# EAGLE board SparkFun_Qwiic_CO2_Sensor_SCD40-Panel (EAGLE 9.6.2), part 1 of 3
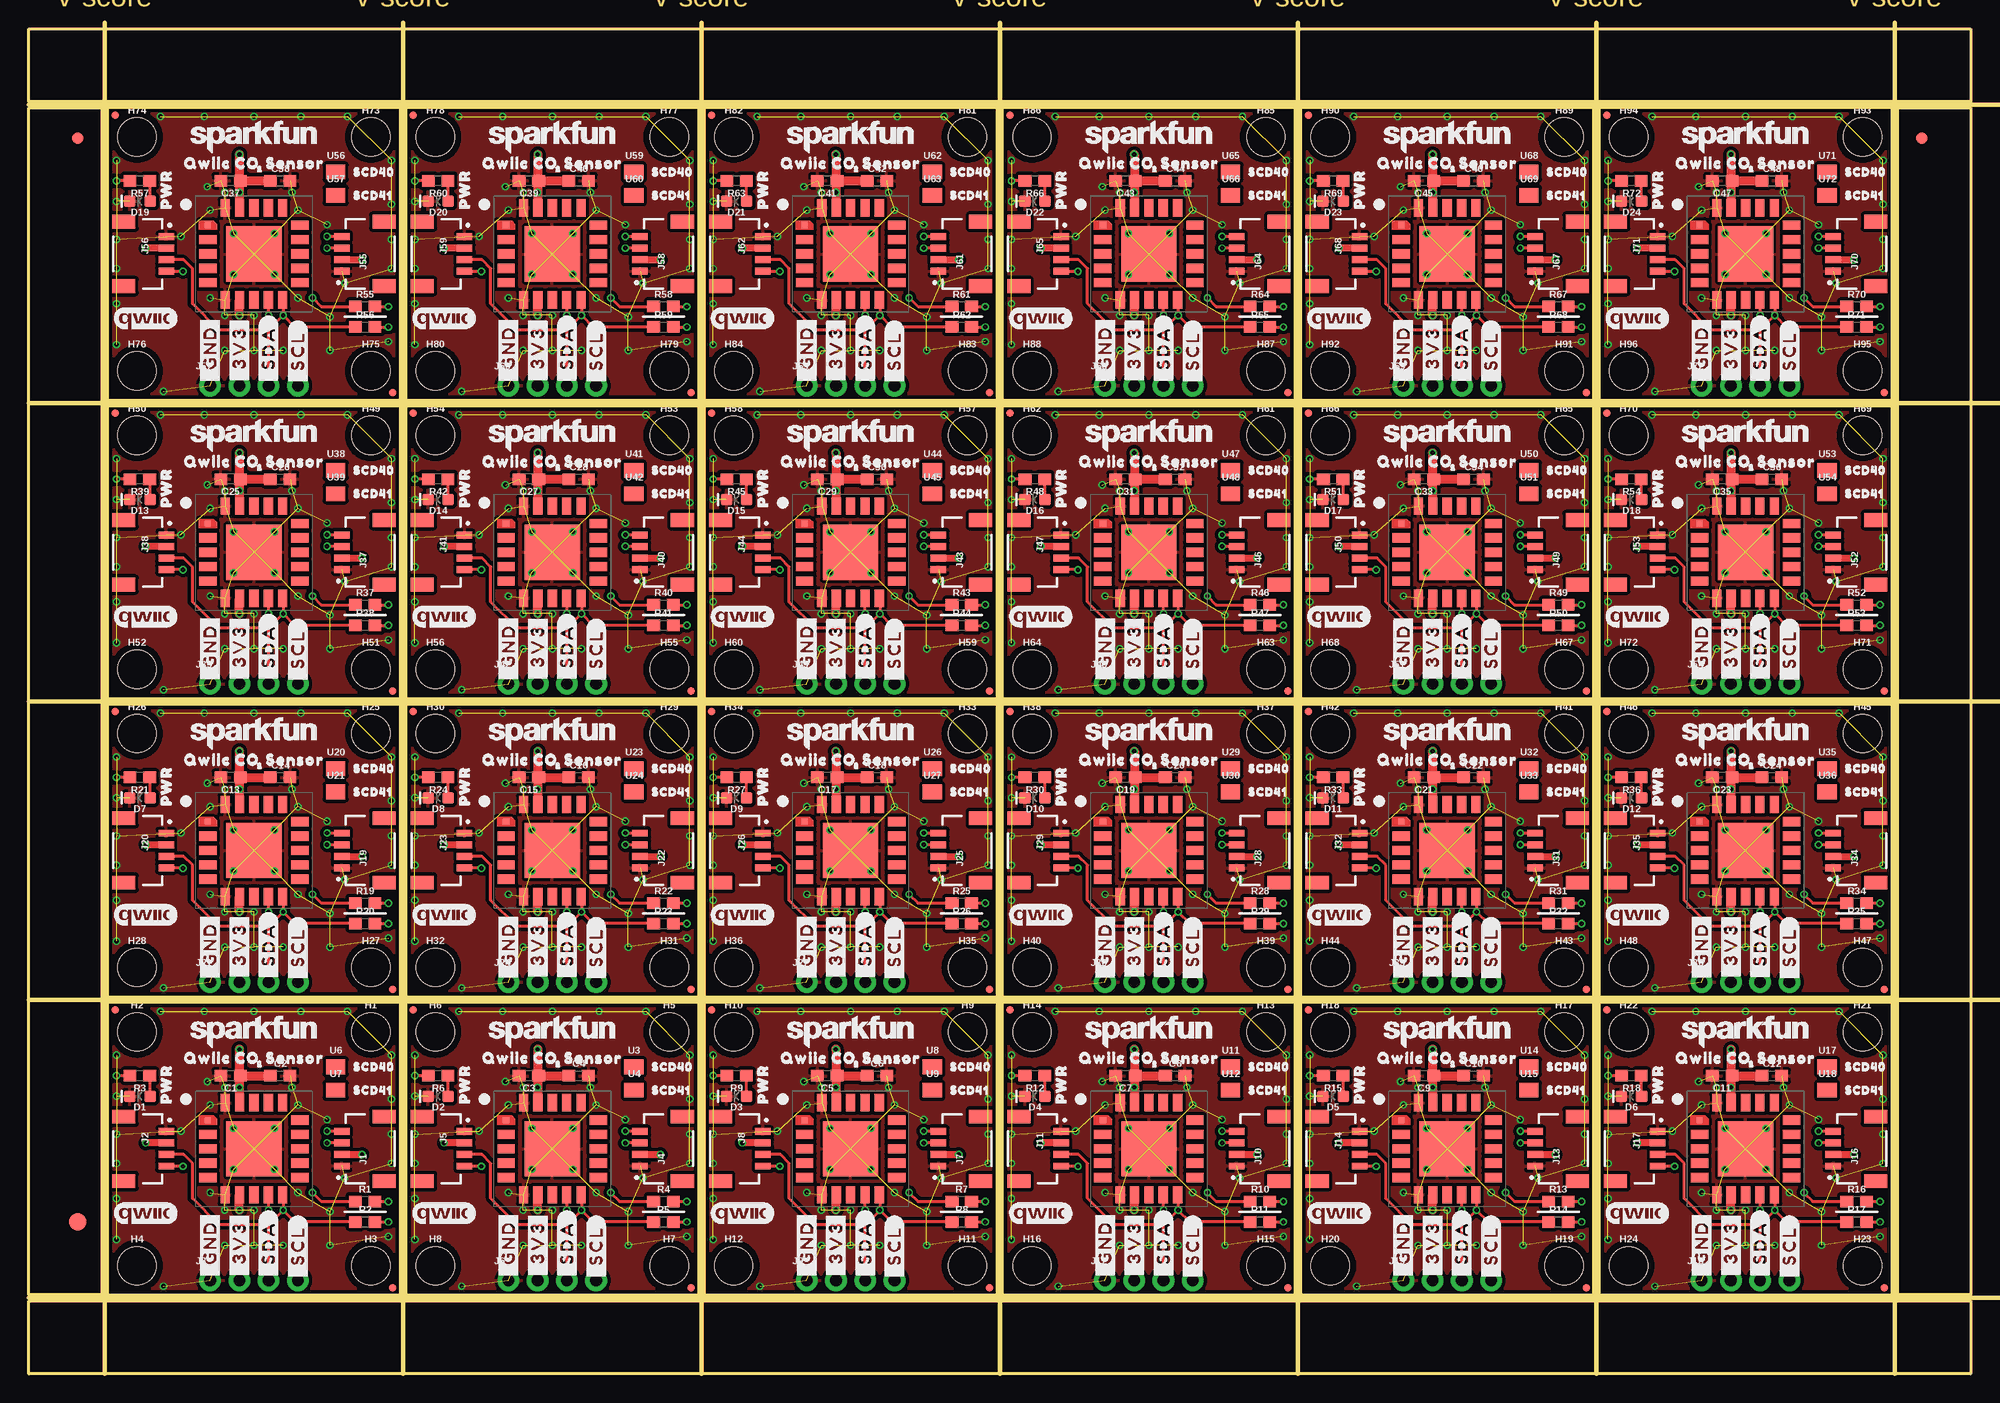
[diagram p0: board, top side]
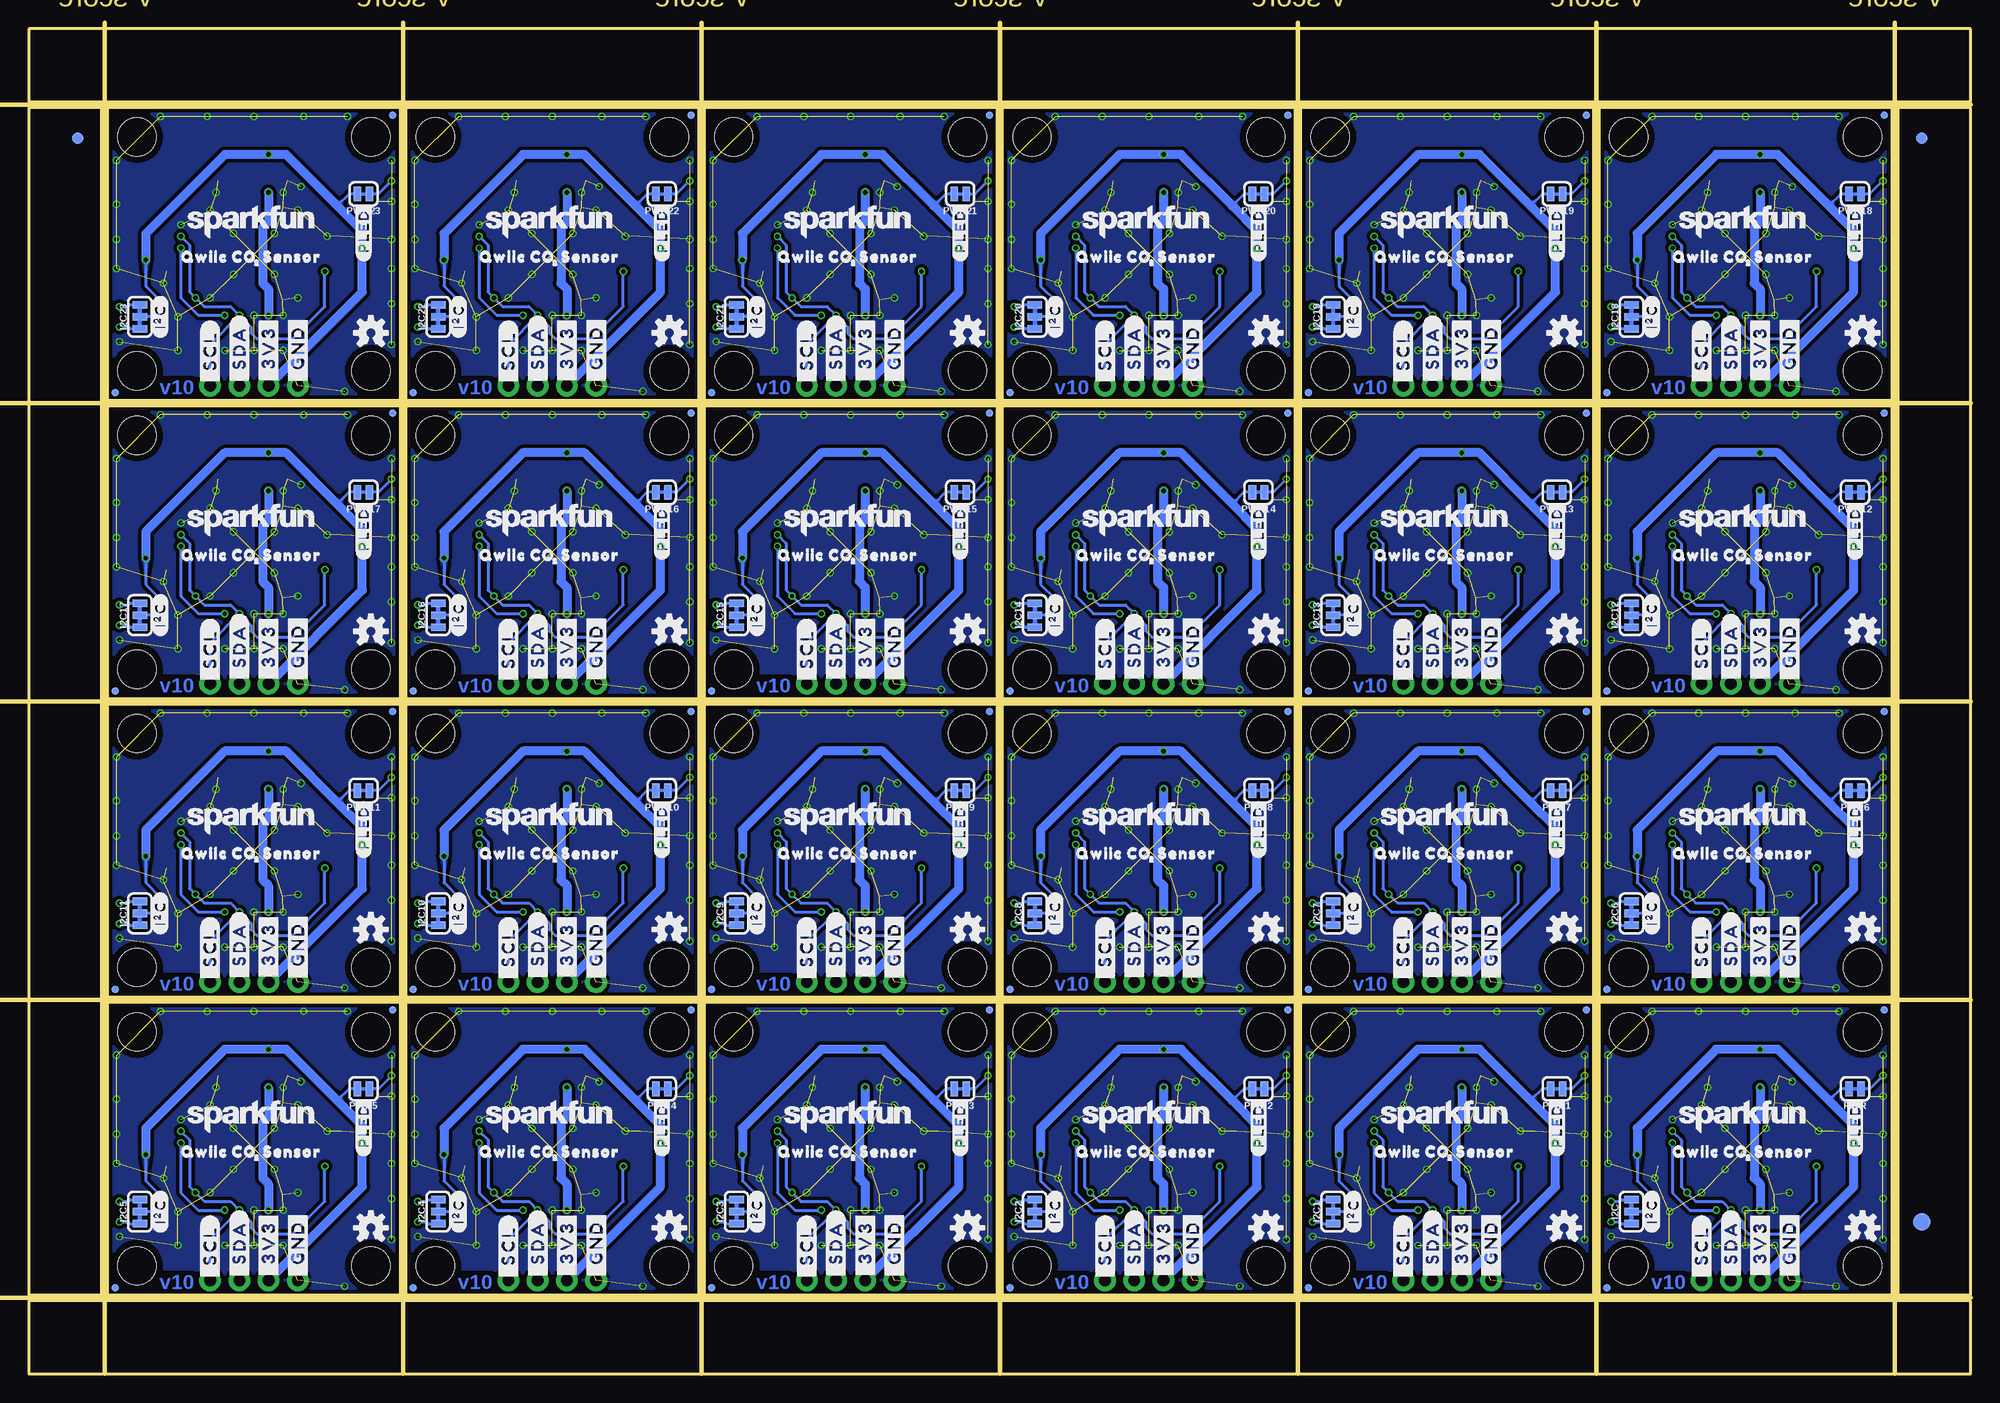
[diagram p1: board, bottom side, seen from below]

Size 168.66 x 116.84 mm. Coordinates in mm from the lower left corner, seen from the top.
Outline: 6.86,6.86 32.26,6.86 32.26,32.26 6.86,32.26 6.86,6.86
Outline: 32.77,6.86 58.17,6.86 58.17,32.26 32.77,32.26 32.77,6.86
Outline: 58.67,6.86 84.07,6.86 84.07,32.26 58.67,32.26 58.67,6.86
Outline: 84.58,6.86 109.98,6.86 109.98,32.26 84.58,32.26 84.58,6.86
Outline: 110.49,6.86 135.89,6.86 135.89,32.26 110.49,32.26 110.49,6.86
Outline: 136.4,6.86 161.8,6.86 161.8,32.26 136.4,32.26 136.4,6.86
Outline: 6.86,32.77 32.26,32.77 32.26,58.17 6.86,58.17 6.86,32.77
Outline: 32.77,32.77 58.17,32.77 58.17,58.17 32.77,58.17 32.77,32.77
Outline: 58.67,32.77 84.07,32.77 84.07,58.17 58.67,58.17 58.67,32.77
Outline: 84.58,32.77 109.98,32.77 109.98,58.17 84.58,58.17 84.58,32.77
Outline: 110.49,32.77 135.89,32.77 135.89,58.17 110.49,58.17 110.49,32.77
Outline: 136.4,32.77 161.8,32.77 161.8,58.17 136.4,58.17 136.4,32.77
Outline: 6.86,58.67 32.26,58.67 32.26,84.07 6.86,84.07 6.86,58.67
Outline: 32.77,58.67 58.17,58.67 58.17,84.07 32.77,84.07 32.77,58.67
Outline: 58.67,58.67 84.07,58.67 84.07,84.07 58.67,84.07 58.67,58.67
Outline: 84.58,58.67 109.98,58.67 109.98,84.07 84.58,84.07 84.58,58.67
Outline: 110.49,58.67 135.89,58.67 135.89,84.07 110.49,84.07 110.49,58.67
Outline: 136.4,58.67 161.8,58.67 161.8,84.07 136.4,84.07 136.4,58.67
Outline: 6.86,84.58 32.26,84.58 32.26,109.98 6.86,109.98 6.86,84.58
Outline: 32.77,84.58 58.17,84.58 58.17,109.98 32.77,109.98 32.77,84.58
Outline: 58.67,84.58 84.07,84.58 84.07,109.98 58.67,109.98 58.67,84.58
Outline: 84.58,84.58 109.98,84.58 109.98,109.98 84.58,109.98 84.58,84.58
Outline: 110.49,84.58 135.89,84.58 135.89,109.98 110.49,109.98 110.49,84.58
Outline: 136.4,84.58 161.8,84.58 161.8,109.98 136.4,109.98 136.4,84.58
Outline: 0,6.35 168.66,6.35 168.66,0 0,0 0,6.35
Outline: 162.31,109.98 168.66,109.98 168.66,6.86 162.31,6.86 162.31,109.98
Outline: 0,116.84 168.66,116.84 168.66,110.49 0,110.49 0,116.84
Outline: 0,109.98 6.35,109.98 6.35,6.86 0,6.86 0,109.98
Copper layers (1*16): Top 0.035mm / dielectric 1.5mm / Bottom 0.035mm
Design rules "SparkFun_Qwiic_CO2_Sensor_SCD40": minimum track width 5mil, minimum drill 0.3mm, track to track 5mil, track to pad 5mil, pad to pad 5mil, via to via 5mil, smd to smd 5mil, copper to edge 7mil, drill to drill 7mil, minimum pad ring 5mil, minimum via ring 5mil, stop-mask expansion 2.5mil, vias tented up to drill 25mil, thermal gap 10mil
Milling: 12 lines

## Footprints (pad centres in the part's own frame; a part is rotated, then mirrored left to right if it is on the bottom)
0603 = smd 1.1 x 1: 1 -0.85,0; 2 0.85,0
LED-0603 = smd 1 x 1: A -0.877,0; C 0.877,0
FIDUCIAL-1X2 = smd 1 x 1: 1 0,0
FIDUCIAL-1.5X3 = smd 1.5 x 1.5: 1 0,0
FIDUCIAL-MICRO = smd 0.635 x 0.635: 1 0,0
STAND-OFF = hole 3.302: 0,0
SMT-JUMPER_3_2-NC_TRACE_SILK = smd 0.66 x 1.27: 1 -1.041,0; 2 0,0; 3 1.041,0
JST04_1MM_RA = smd 0.6 x 1.35: 1 -1.5,0; 2 -0.5,0; 3 0.5,0; 4 1.5,0 | smd 1.2 x 2: NC1 2.8,-3.675; NC2 -2.8,-3.675
1X04_NO_SILK = drill 1.016 pad 1.88: 1 0,0; 2 2.54,0; 3 5.08,0; 4 7.62,0
SMT-JUMPER_2_NC_TRACE_SILK = smd 0.66 x 1.27: 1 -0.521,0; 2 0.521,0
SCD4X = smd 0.5 x 0.5: 1 -4,2.5 | smd 1.5 x 0.8: 2 -4,1.25; 3 -4,0; 4 -4,-1.25; 5 -4,-2.5; 11 4,-2.5; 12 4,-1.25; 13 4,0; 14 4,1.25; 15 4,2.5 | smd 0.8 x 1.5: 6 -2.5,-4; 7 -1.25,-4; 8 0,-4; 9 1.25,-4; 10 2.5,-4; 16 2.5,4; 17 1.25,4; 18 0,4; 19 -1.25,4; 20 -2.5,4 | smd 4.8 x 4.8: CP 0,0
PRODUCT_IDENT_PASTE_NO-SILK = smd 1.676 x 1.27: 1 -0.025,0
PRODUCT_IDENT_NO_NO-SILK = smd 1.676 x 1.27: 1 -0.025,0

## Placement (x,y rotation side)
C1  0.1uF  [0603]  17.53,25.91 180 top
C2  4.7uF  [0603]  21.84,25.91 0 top
C3  0.1uF  [0603]  43.43,25.91 180 top
C4  4.7uF  [0603]  47.75,25.91 0 top
C5  0.1uF  [0603]  69.34,25.91 180 top
C6  4.7uF  [0603]  73.66,25.91 0 top
C7  0.1uF  [0603]  95.25,25.91 180 top
C8  4.7uF  [0603]  99.57,25.91 0 top
C9  0.1uF  [0603]  121.16,25.91 180 top
C10  4.7uF  [0603]  125.48,25.91 0 top
C11  0.1uF  [0603]  147.07,25.91 180 top
C12  4.7uF  [0603]  151.38,25.91 0 top
C13  0.1uF  [0603]  17.53,51.82 180 top
C14  4.7uF  [0603]  21.84,51.82 0 top
C15  0.1uF  [0603]  43.43,51.82 180 top
C16  4.7uF  [0603]  47.75,51.82 0 top
C17  0.1uF  [0603]  69.34,51.82 180 top
C18  4.7uF  [0603]  73.66,51.82 0 top
C19  0.1uF  [0603]  95.25,51.82 180 top
C20  4.7uF  [0603]  99.57,51.82 0 top
C21  0.1uF  [0603]  121.16,51.82 180 top
C22  4.7uF  [0603]  125.48,51.82 0 top
C23  0.1uF  [0603]  147.07,51.82 180 top
C24  4.7uF  [0603]  151.38,51.82 0 top
C25  0.1uF  [0603]  17.53,77.72 180 top
C26  4.7uF  [0603]  21.84,77.72 0 top
C27  0.1uF  [0603]  43.43,77.72 180 top
C28  4.7uF  [0603]  47.75,77.72 0 top
C29  0.1uF  [0603]  69.34,77.72 180 top
C30  4.7uF  [0603]  73.66,77.72 0 top
C31  0.1uF  [0603]  95.25,77.72 180 top
C32  4.7uF  [0603]  99.57,77.72 0 top
C33  0.1uF  [0603]  121.16,77.72 180 top
C34  4.7uF  [0603]  125.48,77.72 0 top
C35  0.1uF  [0603]  147.07,77.72 180 top
C36  4.7uF  [0603]  151.38,77.72 0 top
C37  0.1uF  [0603]  17.53,103.63 180 top
C38  4.7uF  [0603]  21.84,103.63 0 top
C39  0.1uF  [0603]  43.43,103.63 180 top
C40  4.7uF  [0603]  47.75,103.63 0 top
C41  0.1uF  [0603]  69.34,103.63 180 top
C42  4.7uF  [0603]  73.66,103.63 0 top
C43  0.1uF  [0603]  95.25,103.63 180 top
C44  4.7uF  [0603]  99.57,103.63 0 top
C45  0.1uF  [0603]  121.16,103.63 180 top
C46  4.7uF  [0603]  125.48,103.63 0 top
C47  0.1uF  [0603]  147.07,103.63 180 top
C48  4.7uF  [0603]  151.38,103.63 0 top
D1  RED  [LED-0603]  9.65,24.13 180 top
D2  RED  [LED-0603]  35.56,24.13 180 top
D3  RED  [LED-0603]  61.47,24.13 180 top
D4  RED  [LED-0603]  87.38,24.13 180 top
D5  RED  [LED-0603]  113.28,24.13 180 top
D6  RED  [LED-0603]  139.19,24.13 180 top
D7  RED  [LED-0603]  9.65,50.04 180 top
D8  RED  [LED-0603]  35.56,50.04 180 top
D9  RED  [LED-0603]  61.47,50.04 180 top
D10  RED  [LED-0603]  87.38,50.04 180 top
D11  RED  [LED-0603]  113.28,50.04 180 top
D12  RED  [LED-0603]  139.19,50.04 180 top
D13  RED  [LED-0603]  9.65,75.95 180 top
D14  RED  [LED-0603]  35.56,75.95 180 top
D15  RED  [LED-0603]  61.47,75.95 180 top
D16  RED  [LED-0603]  87.38,75.95 180 top
D17  RED  [LED-0603]  113.28,75.95 180 top
D18  RED  [LED-0603]  139.19,75.95 180 top
D19  RED  [LED-0603]  9.65,101.85 180 top
D20  RED  [LED-0603]  35.56,101.85 180 top
D21  RED  [LED-0603]  61.47,101.85 180 top
D22  RED  [LED-0603]  87.38,101.85 180 top
D23  RED  [LED-0603]  113.28,101.85 180 top
D24  RED  [LED-0603]  139.19,101.85 180 top
E$1  [FIDUCIAL-1X2]  4.23,107.31 0 top
E$2  [FIDUCIAL-1X2]  4.23,107.31 0 bottom
E$3  [FIDUCIAL-1X2]  164.42,107.31 0 top
E$4  [FIDUCIAL-1X2]  164.42,107.31 0 bottom
E$5  [FIDUCIAL-1.5X3]  4.23,13.21 0 top
E$6  [FIDUCIAL-1.5X3]  4.23,13.21 0 bottom
FD1  FIDUCIALUFIDUCIAL  [FIDUCIAL-MICRO]  31.62,7.49 0 bottom
FD2  FIDUCIALUFIDUCIAL  [FIDUCIAL-MICRO]  7.49,31.62 0 bottom
FD3  FIDUCIALUFIDUCIAL  [FIDUCIAL-MICRO]  7.49,31.62 0 top
FD4  FIDUCIALUFIDUCIAL  [FIDUCIAL-MICRO]  31.62,7.49 0 top
FD5  FIDUCIALUFIDUCIAL  [FIDUCIAL-MICRO]  57.53,7.49 0 bottom
FD6  FIDUCIALUFIDUCIAL  [FIDUCIAL-MICRO]  33.4,31.62 0 bottom
FD7  FIDUCIALUFIDUCIAL  [FIDUCIAL-MICRO]  33.4,31.62 0 top
FD8  FIDUCIALUFIDUCIAL  [FIDUCIAL-MICRO]  57.53,7.49 0 top
FD9  FIDUCIALUFIDUCIAL  [FIDUCIAL-MICRO]  83.44,7.49 0 bottom
FD10  FIDUCIALUFIDUCIAL  [FIDUCIAL-MICRO]  59.31,31.62 0 bottom
FD11  FIDUCIALUFIDUCIAL  [FIDUCIAL-MICRO]  59.31,31.62 0 top
FD12  FIDUCIALUFIDUCIAL  [FIDUCIAL-MICRO]  83.44,7.49 0 top
FD13  FIDUCIALUFIDUCIAL  [FIDUCIAL-MICRO]  109.35,7.49 0 bottom
FD14  FIDUCIALUFIDUCIAL  [FIDUCIAL-MICRO]  85.22,31.62 0 bottom
FD15  FIDUCIALUFIDUCIAL  [FIDUCIAL-MICRO]  85.22,31.62 0 top
FD16  FIDUCIALUFIDUCIAL  [FIDUCIAL-MICRO]  109.35,7.49 0 top
FD17  FIDUCIALUFIDUCIAL  [FIDUCIAL-MICRO]  135.25,7.49 0 bottom
FD18  FIDUCIALUFIDUCIAL  [FIDUCIAL-MICRO]  111.12,31.62 0 bottom
FD19  FIDUCIALUFIDUCIAL  [FIDUCIAL-MICRO]  111.12,31.62 0 top
FD20  FIDUCIALUFIDUCIAL  [FIDUCIAL-MICRO]  135.25,7.49 0 top
FD21  FIDUCIALUFIDUCIAL  [FIDUCIAL-MICRO]  161.16,7.49 0 bottom
FD22  FIDUCIALUFIDUCIAL  [FIDUCIAL-MICRO]  137.03,31.62 0 bottom
FD23  FIDUCIALUFIDUCIAL  [FIDUCIAL-MICRO]  137.03,31.62 0 top
FD24  FIDUCIALUFIDUCIAL  [FIDUCIAL-MICRO]  161.16,7.49 0 top
FD25  FIDUCIALUFIDUCIAL  [FIDUCIAL-MICRO]  31.62,33.4 0 bottom
FD26  FIDUCIALUFIDUCIAL  [FIDUCIAL-MICRO]  7.49,57.53 0 bottom
FD27  FIDUCIALUFIDUCIAL  [FIDUCIAL-MICRO]  7.49,57.53 0 top
FD28  FIDUCIALUFIDUCIAL  [FIDUCIAL-MICRO]  31.62,33.4 0 top
FD29  FIDUCIALUFIDUCIAL  [FIDUCIAL-MICRO]  57.53,33.4 0 bottom
FD30  FIDUCIALUFIDUCIAL  [FIDUCIAL-MICRO]  33.4,57.53 0 bottom
FD31  FIDUCIALUFIDUCIAL  [FIDUCIAL-MICRO]  33.4,57.53 0 top
FD32  FIDUCIALUFIDUCIAL  [FIDUCIAL-MICRO]  57.53,33.4 0 top
FD33  FIDUCIALUFIDUCIAL  [FIDUCIAL-MICRO]  83.44,33.4 0 bottom
FD34  FIDUCIALUFIDUCIAL  [FIDUCIAL-MICRO]  59.31,57.53 0 bottom
FD35  FIDUCIALUFIDUCIAL  [FIDUCIAL-MICRO]  59.31,57.53 0 top
FD36  FIDUCIALUFIDUCIAL  [FIDUCIAL-MICRO]  83.44,33.4 0 top
FD37  FIDUCIALUFIDUCIAL  [FIDUCIAL-MICRO]  109.35,33.4 0 bottom
FD38  FIDUCIALUFIDUCIAL  [FIDUCIAL-MICRO]  85.22,57.53 0 bottom
FD39  FIDUCIALUFIDUCIAL  [FIDUCIAL-MICRO]  85.22,57.53 0 top
FD40  FIDUCIALUFIDUCIAL  [FIDUCIAL-MICRO]  109.35,33.4 0 top
FD41  FIDUCIALUFIDUCIAL  [FIDUCIAL-MICRO]  135.25,33.4 0 bottom
FD42  FIDUCIALUFIDUCIAL  [FIDUCIAL-MICRO]  111.12,57.53 0 bottom
FD43  FIDUCIALUFIDUCIAL  [FIDUCIAL-MICRO]  111.12,57.53 0 top
FD44  FIDUCIALUFIDUCIAL  [FIDUCIAL-MICRO]  135.25,33.4 0 top
FD45  FIDUCIALUFIDUCIAL  [FIDUCIAL-MICRO]  161.16,33.4 0 bottom
FD46  FIDUCIALUFIDUCIAL  [FIDUCIAL-MICRO]  137.03,57.53 0 bottom
FD47  FIDUCIALUFIDUCIAL  [FIDUCIAL-MICRO]  137.03,57.53 0 top
FD48  FIDUCIALUFIDUCIAL  [FIDUCIAL-MICRO]  161.16,33.4 0 top
FD49  FIDUCIALUFIDUCIAL  [FIDUCIAL-MICRO]  31.62,59.31 0 bottom
FD50  FIDUCIALUFIDUCIAL  [FIDUCIAL-MICRO]  7.49,83.44 0 bottom
FD51  FIDUCIALUFIDUCIAL  [FIDUCIAL-MICRO]  7.49,83.44 0 top
FD52  FIDUCIALUFIDUCIAL  [FIDUCIAL-MICRO]  31.62,59.31 0 top
FD53  FIDUCIALUFIDUCIAL  [FIDUCIAL-MICRO]  57.53,59.31 0 bottom
FD54  FIDUCIALUFIDUCIAL  [FIDUCIAL-MICRO]  33.4,83.44 0 bottom
FD55  FIDUCIALUFIDUCIAL  [FIDUCIAL-MICRO]  33.4,83.44 0 top
FD56  FIDUCIALUFIDUCIAL  [FIDUCIAL-MICRO]  57.53,59.31 0 top
FD57  FIDUCIALUFIDUCIAL  [FIDUCIAL-MICRO]  83.44,59.31 0 bottom
FD58  FIDUCIALUFIDUCIAL  [FIDUCIAL-MICRO]  59.31,83.44 0 bottom
FD59  FIDUCIALUFIDUCIAL  [FIDUCIAL-MICRO]  59.31,83.44 0 top
FD60  FIDUCIALUFIDUCIAL  [FIDUCIAL-MICRO]  83.44,59.31 0 top
FD61  FIDUCIALUFIDUCIAL  [FIDUCIAL-MICRO]  109.35,59.31 0 bottom
FD62  FIDUCIALUFIDUCIAL  [FIDUCIAL-MICRO]  85.22,83.44 0 bottom
FD63  FIDUCIALUFIDUCIAL  [FIDUCIAL-MICRO]  85.22,83.44 0 top
FD64  FIDUCIALUFIDUCIAL  [FIDUCIAL-MICRO]  109.35,59.31 0 top
FD65  FIDUCIALUFIDUCIAL  [FIDUCIAL-MICRO]  135.25,59.31 0 bottom
FD66  FIDUCIALUFIDUCIAL  [FIDUCIAL-MICRO]  111.12,83.44 0 bottom
FD67  FIDUCIALUFIDUCIAL  [FIDUCIAL-MICRO]  111.12,83.44 0 top
FD68  FIDUCIALUFIDUCIAL  [FIDUCIAL-MICRO]  135.25,59.31 0 top
FD69  FIDUCIALUFIDUCIAL  [FIDUCIAL-MICRO]  161.16,59.31 0 bottom
FD70  FIDUCIALUFIDUCIAL  [FIDUCIAL-MICRO]  137.03,83.44 0 bottom
FD71  FIDUCIALUFIDUCIAL  [FIDUCIAL-MICRO]  137.03,83.44 0 top
FD72  FIDUCIALUFIDUCIAL  [FIDUCIAL-MICRO]  161.16,59.31 0 top
FD73  FIDUCIALUFIDUCIAL  [FIDUCIAL-MICRO]  31.62,85.22 0 bottom
FD74  FIDUCIALUFIDUCIAL  [FIDUCIAL-MICRO]  7.49,109.35 0 bottom
FD75  FIDUCIALUFIDUCIAL  [FIDUCIAL-MICRO]  7.49,109.35 0 top
FD76  FIDUCIALUFIDUCIAL  [FIDUCIAL-MICRO]  31.62,85.22 0 top
FD77  FIDUCIALUFIDUCIAL  [FIDUCIAL-MICRO]  57.53,85.22 0 bottom
FD78  FIDUCIALUFIDUCIAL  [FIDUCIAL-MICRO]  33.4,109.35 0 bottom
FD79  FIDUCIALUFIDUCIAL  [FIDUCIAL-MICRO]  33.4,109.35 0 top
FD80  FIDUCIALUFIDUCIAL  [FIDUCIAL-MICRO]  57.53,85.22 0 top
FD81  FIDUCIALUFIDUCIAL  [FIDUCIAL-MICRO]  83.44,85.22 0 bottom
FD82  FIDUCIALUFIDUCIAL  [FIDUCIAL-MICRO]  59.31,109.35 0 bottom
FD83  FIDUCIALUFIDUCIAL  [FIDUCIAL-MICRO]  59.31,109.35 0 top
FD84  FIDUCIALUFIDUCIAL  [FIDUCIAL-MICRO]  83.44,85.22 0 top
FD85  FIDUCIALUFIDUCIAL  [FIDUCIAL-MICRO]  109.35,85.22 0 bottom
FD86  FIDUCIALUFIDUCIAL  [FIDUCIAL-MICRO]  85.22,109.35 0 bottom
FD87  FIDUCIALUFIDUCIAL  [FIDUCIAL-MICRO]  85.22,109.35 0 top
FD88  FIDUCIALUFIDUCIAL  [FIDUCIAL-MICRO]  109.35,85.22 0 top
FD89  FIDUCIALUFIDUCIAL  [FIDUCIAL-MICRO]  135.25,85.22 0 bottom
FD90  FIDUCIALUFIDUCIAL  [FIDUCIAL-MICRO]  111.12,109.35 0 bottom
FD91  FIDUCIALUFIDUCIAL  [FIDUCIAL-MICRO]  111.12,109.35 0 top
FD92  FIDUCIALUFIDUCIAL  [FIDUCIAL-MICRO]  135.25,85.22 0 top
FD93  FIDUCIALUFIDUCIAL  [FIDUCIAL-MICRO]  161.16,85.22 0 bottom
FD94  FIDUCIALUFIDUCIAL  [FIDUCIAL-MICRO]  137.03,109.35 0 bottom
FD95  FIDUCIALUFIDUCIAL  [FIDUCIAL-MICRO]  137.03,109.35 0 top
FD96  FIDUCIALUFIDUCIAL  [FIDUCIAL-MICRO]  161.16,85.22 0 top
H1  STAND-OFF  [STAND-OFF]  29.72,29.72 0 top
H2  STAND-OFF  [STAND-OFF]  9.4,29.72 0 top
H3  STAND-OFF  [STAND-OFF]  29.72,9.4 0 top
H4  STAND-OFF  [STAND-OFF]  9.4,9.4 0 top
H5  STAND-OFF  [STAND-OFF]  55.63,29.72 0 top
H6  STAND-OFF  [STAND-OFF]  35.31,29.72 0 top
H7  STAND-OFF  [STAND-OFF]  55.63,9.4 0 top
H8  STAND-OFF  [STAND-OFF]  35.31,9.4 0 top
H9  STAND-OFF  [STAND-OFF]  81.53,29.72 0 top
H10  STAND-OFF  [STAND-OFF]  61.21,29.72 0 top
H11  STAND-OFF  [STAND-OFF]  81.53,9.4 0 top
H12  STAND-OFF  [STAND-OFF]  61.21,9.4 0 top
H13  STAND-OFF  [STAND-OFF]  107.44,29.72 0 top
H14  STAND-OFF  [STAND-OFF]  87.12,29.72 0 top
H15  STAND-OFF  [STAND-OFF]  107.44,9.4 0 top
H16  STAND-OFF  [STAND-OFF]  87.12,9.4 0 top
H17  STAND-OFF  [STAND-OFF]  133.35,29.72 0 top
H18  STAND-OFF  [STAND-OFF]  113.03,29.72 0 top
H19  STAND-OFF  [STAND-OFF]  133.35,9.4 0 top
H20  STAND-OFF  [STAND-OFF]  113.03,9.4 0 top
H21  STAND-OFF  [STAND-OFF]  159.26,29.72 0 top
H22  STAND-OFF  [STAND-OFF]  138.94,29.72 0 top
H23  STAND-OFF  [STAND-OFF]  159.26,9.4 0 top
H24  STAND-OFF  [STAND-OFF]  138.94,9.4 0 top
H25  STAND-OFF  [STAND-OFF]  29.72,55.63 0 top
H26  STAND-OFF  [STAND-OFF]  9.4,55.63 0 top
H27  STAND-OFF  [STAND-OFF]  29.72,35.31 0 top
H28  STAND-OFF  [STAND-OFF]  9.4,35.31 0 top
H29  STAND-OFF  [STAND-OFF]  55.63,55.63 0 top
H30  STAND-OFF  [STAND-OFF]  35.31,55.63 0 top
H31  STAND-OFF  [STAND-OFF]  55.63,35.31 0 top
H32  STAND-OFF  [STAND-OFF]  35.31,35.31 0 top
H33  STAND-OFF  [STAND-OFF]  81.53,55.63 0 top
H34  STAND-OFF  [STAND-OFF]  61.21,55.63 0 top
H35  STAND-OFF  [STAND-OFF]  81.53,35.31 0 top
H36  STAND-OFF  [STAND-OFF]  61.21,35.31 0 top
H37  STAND-OFF  [STAND-OFF]  107.44,55.63 0 top
H38  STAND-OFF  [STAND-OFF]  87.12,55.63 0 top
H39  STAND-OFF  [STAND-OFF]  107.44,35.31 0 top
H40  STAND-OFF  [STAND-OFF]  87.12,35.31 0 top
H41  STAND-OFF  [STAND-OFF]  133.35,55.63 0 top
H42  STAND-OFF  [STAND-OFF]  113.03,55.63 0 top
H43  STAND-OFF  [STAND-OFF]  133.35,35.31 0 top
H44  STAND-OFF  [STAND-OFF]  113.03,35.31 0 top
H45  STAND-OFF  [STAND-OFF]  159.26,55.63 0 top
H46  STAND-OFF  [STAND-OFF]  138.94,55.63 0 top
H47  STAND-OFF  [STAND-OFF]  159.26,35.31 0 top
H48  STAND-OFF  [STAND-OFF]  138.94,35.31 0 top
H49  STAND-OFF  [STAND-OFF]  29.72,81.53 0 top
H50  STAND-OFF  [STAND-OFF]  9.4,81.53 0 top
H51  STAND-OFF  [STAND-OFF]  29.72,61.21 0 top
H52  STAND-OFF  [STAND-OFF]  9.4,61.21 0 top
H53  STAND-OFF  [STAND-OFF]  55.63,81.53 0 top
H54  STAND-OFF  [STAND-OFF]  35.31,81.53 0 top
H55  STAND-OFF  [STAND-OFF]  55.63,61.21 0 top
H56  STAND-OFF  [STAND-OFF]  35.31,61.21 0 top
H57  STAND-OFF  [STAND-OFF]  81.53,81.53 0 top
H58  STAND-OFF  [STAND-OFF]  61.21,81.53 0 top
H59  STAND-OFF  [STAND-OFF]  81.53,61.21 0 top
H60  STAND-OFF  [STAND-OFF]  61.21,61.21 0 top
H61  STAND-OFF  [STAND-OFF]  107.44,81.53 0 top
H62  STAND-OFF  [STAND-OFF]  87.12,81.53 0 top
H63  STAND-OFF  [STAND-OFF]  107.44,61.21 0 top
H64  STAND-OFF  [STAND-OFF]  87.12,61.21 0 top
H65  STAND-OFF  [STAND-OFF]  133.35,81.53 0 top
H66  STAND-OFF  [STAND-OFF]  113.03,81.53 0 top
H67  STAND-OFF  [STAND-OFF]  133.35,61.21 0 top
H68  STAND-OFF  [STAND-OFF]  113.03,61.21 0 top
H69  STAND-OFF  [STAND-OFF]  159.26,81.53 0 top
H70  STAND-OFF  [STAND-OFF]  138.94,81.53 0 top
H71  STAND-OFF  [STAND-OFF]  159.26,61.21 0 top
H72  STAND-OFF  [STAND-OFF]  138.94,61.21 0 top
H73  STAND-OFF  [STAND-OFF]  29.72,107.44 0 top
H74  STAND-OFF  [STAND-OFF]  9.4,107.44 0 top
H75  STAND-OFF  [STAND-OFF]  29.72,87.12 0 top
H76  STAND-OFF  [STAND-OFF]  9.4,87.12 0 top
H77  STAND-OFF  [STAND-OFF]  55.63,107.44 0 top
H78  STAND-OFF  [STAND-OFF]  35.31,107.44 0 top
H79  STAND-OFF  [STAND-OFF]  55.63,87.12 0 top
H80  STAND-OFF  [STAND-OFF]  35.31,87.12 0 top
H81  STAND-OFF  [STAND-OFF]  81.53,107.44 0 top
H82  STAND-OFF  [STAND-OFF]  61.21,107.44 0 top
H83  STAND-OFF  [STAND-OFF]  81.53,87.12 0 top
H84  STAND-OFF  [STAND-OFF]  61.21,87.12 0 top
H85  STAND-OFF  [STAND-OFF]  107.44,107.44 0 top
H86  STAND-OFF  [STAND-OFF]  87.12,107.44 0 top
H87  STAND-OFF  [STAND-OFF]  107.44,87.12 0 top
H88  STAND-OFF  [STAND-OFF]  87.12,87.12 0 top
H89  STAND-OFF  [STAND-OFF]  133.35,107.44 0 top
H90  STAND-OFF  [STAND-OFF]  113.03,107.44 0 top
H91  STAND-OFF  [STAND-OFF]  133.35,87.12 0 top
H92  STAND-OFF  [STAND-OFF]  113.03,87.12 0 top
H93  STAND-OFF  [STAND-OFF]  159.26,107.44 0 top
H94  STAND-OFF  [STAND-OFF]  138.94,107.44 0 top
H95  STAND-OFF  [STAND-OFF]  159.26,87.12 0 top
H96  STAND-OFF  [STAND-OFF]  138.94,87.12 0 top
I2C  I2C  [SMT-JUMPER_3_2-NC_TRACE_SILK]  29.46,14.1 90 bottom
I2C1  I2C  [SMT-JUMPER_3_2-NC_TRACE_SILK]  55.37,14.1 90 bottom
I2C2  I2C  [SMT-JUMPER_3_2-NC_TRACE_SILK]  81.28,14.1 90 bottom
I2C3  I2C  [SMT-JUMPER_3_2-NC_TRACE_SILK]  107.19,14.1 90 bottom
I2C4  I2C  [SMT-JUMPER_3_2-NC_TRACE_SILK]  133.1,14.1 90 bottom
I2C5  I2C  [SMT-JUMPER_3_2-NC_TRACE_SILK]  159,14.1 90 bottom
I2C6  I2C  [SMT-JUMPER_3_2-NC_TRACE_SILK]  29.46,40 90 bottom
I2C7  I2C  [SMT-JUMPER_3_2-NC_TRACE_SILK]  55.37,40 90 bottom
I2C8  I2C  [SMT-JUMPER_3_2-NC_TRACE_SILK]  81.28,40 90 bottom
I2C9  I2C  [SMT-JUMPER_3_2-NC_TRACE_SILK]  107.19,40 90 bottom
I2C10  I2C  [SMT-JUMPER_3_2-NC_TRACE_SILK]  133.1,40 90 bottom
I2C11  I2C  [SMT-JUMPER_3_2-NC_TRACE_SILK]  159,40 90 bottom
I2C12  I2C  [SMT-JUMPER_3_2-NC_TRACE_SILK]  29.46,65.91 90 bottom
I2C13  I2C  [SMT-JUMPER_3_2-NC_TRACE_SILK]  55.37,65.91 90 bottom
I2C14  I2C  [SMT-JUMPER_3_2-NC_TRACE_SILK]  81.28,65.91 90 bottom
I2C15  I2C  [SMT-JUMPER_3_2-NC_TRACE_SILK]  107.19,65.91 90 bottom
I2C16  I2C  [SMT-JUMPER_3_2-NC_TRACE_SILK]  133.1,65.91 90 bottom
I2C17  I2C  [SMT-JUMPER_3_2-NC_TRACE_SILK]  159,65.91 90 bottom
I2C18  I2C  [SMT-JUMPER_3_2-NC_TRACE_SILK]  29.46,91.82 90 bottom
I2C19  I2C  [SMT-JUMPER_3_2-NC_TRACE_SILK]  55.37,91.82 90 bottom
I2C20  I2C  [SMT-JUMPER_3_2-NC_TRACE_SILK]  81.28,91.82 90 bottom
I2C21  I2C  [SMT-JUMPER_3_2-NC_TRACE_SILK]  107.19,91.82 90 bottom
I2C22  I2C  [SMT-JUMPER_3_2-NC_TRACE_SILK]  133.1,91.82 90 bottom
I2C23  I2C  [SMT-JUMPER_3_2-NC_TRACE_SILK]  159,91.82 90 bottom
J1  QWIIC_RA  [JST04_1MM_RA]  27.18,19.56 90 top
J2  QWIIC_RA  [JST04_1MM_RA]  11.94,19.56 270 top
J3  PTH  [1X04_NO_SILK]  15.75,8.13 0 top
J4  QWIIC_RA  [JST04_1MM_RA]  53.09,19.56 90 top
J5  QWIIC_RA  [JST04_1MM_RA]  37.85,19.56 270 top
J6  PTH  [1X04_NO_SILK]  41.66,8.13 0 top
J7  QWIIC_RA  [JST04_1MM_RA]  78.99,19.56 90 top
J8  QWIIC_RA  [JST04_1MM_RA]  63.75,19.56 270 top
J9  PTH  [1X04_NO_SILK]  67.56,8.13 0 top
J10  QWIIC_RA  [JST04_1MM_RA]  104.9,19.56 90 top
J11  QWIIC_RA  [JST04_1MM_RA]  89.66,19.56 270 top
J12  PTH  [1X04_NO_SILK]  93.47,8.13 0 top
J13  QWIIC_RA  [JST04_1MM_RA]  130.81,19.56 90 top
J14  QWIIC_RA  [JST04_1MM_RA]  115.57,19.56 270 top
J15  PTH  [1X04_NO_SILK]  119.38,8.13 0 top
J16  QWIIC_RA  [JST04_1MM_RA]  156.72,19.56 90 top
J17  QWIIC_RA  [JST04_1MM_RA]  141.48,19.56 270 top
J18  PTH  [1X04_NO_SILK]  145.29,8.13 0 top
J19  QWIIC_RA  [JST04_1MM_RA]  27.18,45.47 90 top
J20  QWIIC_RA  [JST04_1MM_RA]  11.94,45.47 270 top
J21  PTH  [1X04_NO_SILK]  15.75,34.04 0 top
J22  QWIIC_RA  [JST04_1MM_RA]  53.09,45.47 90 top
J23  QWIIC_RA  [JST04_1MM_RA]  37.85,45.47 270 top
J24  PTH  [1X04_NO_SILK]  41.66,34.04 0 top
J25  QWIIC_RA  [JST04_1MM_RA]  78.99,45.47 90 top
J26  QWIIC_RA  [JST04_1MM_RA]  63.75,45.47 270 top
J27  PTH  [1X04_NO_SILK]  67.56,34.04 0 top
J28  QWIIC_RA  [JST04_1MM_RA]  104.9,45.47 90 top
J29  QWIIC_RA  [JST04_1MM_RA]  89.66,45.47 270 top
J30  PTH  [1X04_NO_SILK]  93.47,34.04 0 top
J31  QWIIC_RA  [JST04_1MM_RA]  130.81,45.47 90 top
J32  QWIIC_RA  [JST04_1MM_RA]  115.57,45.47 270 top
J33  PTH  [1X04_NO_SILK]  119.38,34.04 0 top
J34  QWIIC_RA  [JST04_1MM_RA]  156.72,45.47 90 top
J35  QWIIC_RA  [JST04_1MM_RA]  141.48,45.47 270 top
J36  PTH  [1X04_NO_SILK]  145.29,34.04 0 top
J37  QWIIC_RA  [JST04_1MM_RA]  27.18,71.37 90 top
J38  QWIIC_RA  [JST04_1MM_RA]  11.94,71.37 270 top
J39  PTH  [1X04_NO_SILK]  15.75,59.94 0 top
J40  QWIIC_RA  [JST04_1MM_RA]  53.09,71.37 90 top
J41  QWIIC_RA  [JST04_1MM_RA]  37.85,71.37 270 top
J42  PTH  [1X04_NO_SILK]  41.66,59.94 0 top
J43  QWIIC_RA  [JST04_1MM_RA]  78.99,71.37 90 top
J44  QWIIC_RA  [JST04_1MM_RA]  63.75,71.37 270 top
J45  PTH  [1X04_NO_SILK]  67.56,59.94 0 top
J46  QWIIC_RA  [JST04_1MM_RA]  104.9,71.37 90 top
J47  QWIIC_RA  [JST04_1MM_RA]  89.66,71.37 270 top
J48  PTH  [1X04_NO_SILK]  93.47,59.94 0 top
J49  QWIIC_RA  [JST04_1MM_RA]  130.81,71.37 90 top
J50  QWIIC_RA  [JST04_1MM_RA]  115.57,71.37 270 top
J51  PTH  [1X04_NO_SILK]  119.38,59.94 0 top
J52  QWIIC_RA  [JST04_1MM_RA]  156.72,71.37 90 top
J53  QWIIC_RA  [JST04_1MM_RA]  141.48,71.37 270 top
J54  PTH  [1X04_NO_SILK]  145.29,59.94 0 top
J55  QWIIC_RA  [JST04_1MM_RA]  27.18,97.28 90 top
J56  QWIIC_RA  [JST04_1MM_RA]  11.94,97.28 270 top
J57  PTH  [1X04_NO_SILK]  15.75,85.85 0 top
J58  QWIIC_RA  [JST04_1MM_RA]  53.09,97.28 90 top
J59  QWIIC_RA  [JST04_1MM_RA]  37.85,97.28 270 top
J60  PTH  [1X04_NO_SILK]  41.66,85.85 0 top
J61  QWIIC_RA  [JST04_1MM_RA]  78.99,97.28 90 top
J62  QWIIC_RA  [JST04_1MM_RA]  63.75,97.28 270 top
J63  PTH  [1X04_NO_SILK]  67.56,85.85 0 top
J64  QWIIC_RA  [JST04_1MM_RA]  104.9,97.28 90 top
J65  QWIIC_RA  [JST04_1MM_RA]  89.66,97.28 270 top
J66  PTH  [1X04_NO_SILK]  93.47,85.85 0 top
J67  QWIIC_RA  [JST04_1MM_RA]  130.81,97.28 90 top
J68  QWIIC_RA  [JST04_1MM_RA]  115.57,97.28 270 top
J69  PTH  [1X04_NO_SILK]  119.38,85.85 0 top
J70  QWIIC_RA  [JST04_1MM_RA]  156.72,97.28 90 top
J71  QWIIC_RA  [JST04_1MM_RA]  141.48,97.28 270 top
J72  PTH  [1X04_NO_SILK]  145.29,85.85 0 top
LOGO1  QWIIC_LOGO_CONNECTOR  [QWIIC_5.5MM]  10.16,13.97 0 top
LOGO2  OSHW-LOGOS  [OSHW-LOGO-S]  9.4,12.7 0 bottom
LOGO3  SFE_LOGO_NAME_FLAMEBLANK  [BLANK]  35.31,6.86 0 top
LOGO4  QWIIC_LOGO_CONNECTOR  [QWIIC_5.5MM]  36.07,13.97 0 top
LOGO5  OSHW-LOGOS  [OSHW-LOGO-S]  35.31,12.7 0 bottom
LOGO6  SFE_LOGO_NAME_FLAMEBLANK  [BLANK]  61.21,6.86 0 top
LOGO7  QWIIC_LOGO_CONNECTOR  [QWIIC_5.5MM]  61.98,13.97 0 top
LOGO8  OSHW-LOGOS  [OSHW-LOGO-S]  61.21,12.7 0 bottom
LOGO9  SFE_LOGO_NAME_FLAMEBLANK  [BLANK]  87.12,6.86 0 top
LOGO10  QWIIC_LOGO_CONNECTOR  [QWIIC_5.5MM]  87.88,13.97 0 top
LOGO11  OSHW-LOGOS  [OSHW-LOGO-S]  87.12,12.7 0 bottom
LOGO12  SFE_LOGO_NAME_FLAMEBLANK  [BLANK]  113.03,6.86 0 top
LOGO13  QWIIC_LOGO_CONNECTOR  [QWIIC_5.5MM]  113.79,13.97 0 top
LOGO14  OSHW-LOGOS  [OSHW-LOGO-S]  113.03,12.7 0 bottom
LOGO15  SFE_LOGO_NAME_FLAMEBLANK  [BLANK]  138.94,6.86 0 top
LOGO16  QWIIC_LOGO_CONNECTOR  [QWIIC_5.5MM]  139.7,13.97 0 top
LOGO17  OSHW-LOGOS  [OSHW-LOGO-S]  138.94,12.7 0 bottom
LOGO18  SFE_LOGO_NAME_FLAMEBLANK  [BLANK]  164.85,6.86 0 top
LOGO19  QWIIC_LOGO_CONNECTOR  [QWIIC_5.5MM]  10.16,39.88 0 top
LOGO20  OSHW-LOGOS  [OSHW-LOGO-S]  9.4,38.61 0 bottom
LOGO21  SFE_LOGO_NAME_FLAMEBLANK  [BLANK]  35.31,32.77 0 top
LOGO22  QWIIC_LOGO_CONNECTOR  [QWIIC_5.5MM]  36.07,39.88 0 top
LOGO23  OSHW-LOGOS  [OSHW-LOGO-S]  35.31,38.61 0 bottom
LOGO24  SFE_LOGO_NAME_FLAMEBLANK  [BLANK]  61.21,32.77 0 top
LOGO25  QWIIC_LOGO_CONNECTOR  [QWIIC_5.5MM]  61.98,39.88 0 top
LOGO26  OSHW-LOGOS  [OSHW-LOGO-S]  61.21,38.61 0 bottom
LOGO27  SFE_LOGO_NAME_FLAMEBLANK  [BLANK]  87.12,32.77 0 top
LOGO28  QWIIC_LOGO_CONNECTOR  [QWIIC_5.5MM]  87.88,39.88 0 top
LOGO29  OSHW-LOGOS  [OSHW-LOGO-S]  87.12,38.61 0 bottom
LOGO30  SFE_LOGO_NAME_FLAMEBLANK  [BLANK]  113.03,32.77 0 top
LOGO31  QWIIC_LOGO_CONNECTOR  [QWIIC_5.5MM]  113.79,39.88 0 top
LOGO32  OSHW-LOGOS  [OSHW-LOGO-S]  113.03,38.61 0 bottom
LOGO33  SFE_LOGO_NAME_FLAMEBLANK  [BLANK]  138.94,32.77 0 top
LOGO34  QWIIC_LOGO_CONNECTOR  [QWIIC_5.5MM]  139.7,39.88 0 top
LOGO35  OSHW-LOGOS  [OSHW-LOGO-S]  138.94,38.61 0 bottom
LOGO36  SFE_LOGO_NAME_FLAMEBLANK  [BLANK]  164.85,32.77 0 top
LOGO37  QWIIC_LOGO_CONNECTOR  [QWIIC_5.5MM]  10.16,65.79 0 top
LOGO38  OSHW-LOGOS  [OSHW-LOGO-S]  9.4,64.52 0 bottom
LOGO39  SFE_LOGO_NAME_FLAMEBLANK  [BLANK]  35.31,58.67 0 top
LOGO40  QWIIC_LOGO_CONNECTOR  [QWIIC_5.5MM]  36.07,65.79 0 top
LOGO41  OSHW-LOGOS  [OSHW-LOGO-S]  35.31,64.52 0 bottom
LOGO42  SFE_LOGO_NAME_FLAMEBLANK  [BLANK]  61.21,58.67 0 top
LOGO43  QWIIC_LOGO_CONNECTOR  [QWIIC_5.5MM]  61.98,65.79 0 top
LOGO44  OSHW-LOGOS  [OSHW-LOGO-S]  61.21,64.52 0 bottom
LOGO45  SFE_LOGO_NAME_FLAMEBLANK  [BLANK]  87.12,58.67 0 top
LOGO46  QWIIC_LOGO_CONNECTOR  [QWIIC_5.5MM]  87.88,65.79 0 top
LOGO47  OSHW-LOGOS  [OSHW-LOGO-S]  87.12,64.52 0 bottom
LOGO48  SFE_LOGO_NAME_FLAMEBLANK  [BLANK]  113.03,58.67 0 top
LOGO49  QWIIC_LOGO_CONNECTOR  [QWIIC_5.5MM]  113.79,65.79 0 top
LOGO50  OSHW-LOGOS  [OSHW-LOGO-S]  113.03,64.52 0 bottom
LOGO51  SFE_LOGO_NAME_FLAMEBLANK  [BLANK]  138.94,58.67 0 top
LOGO52  QWIIC_LOGO_CONNECTOR  [QWIIC_5.5MM]  139.7,65.79 0 top
LOGO53  OSHW-LOGOS  [OSHW-LOGO-S]  138.94,64.52 0 bottom
LOGO54  SFE_LOGO_NAME_FLAMEBLANK  [BLANK]  164.85,58.67 0 top
LOGO55  QWIIC_LOGO_CONNECTOR  [QWIIC_5.5MM]  10.16,91.69 0 top
LOGO56  OSHW-LOGOS  [OSHW-LOGO-S]  9.4,90.42 0 bottom
LOGO57  SFE_LOGO_NAME_FLAMEBLANK  [BLANK]  35.31,84.58 0 top
LOGO58  QWIIC_LOGO_CONNECTOR  [QWIIC_5.5MM]  36.07,91.69 0 top
LOGO59  OSHW-LOGOS  [OSHW-LOGO-S]  35.31,90.42 0 bottom
LOGO60  SFE_LOGO_NAME_FLAMEBLANK  [BLANK]  61.21,84.58 0 top
LOGO61  QWIIC_LOGO_CONNECTOR  [QWIIC_5.5MM]  61.98,91.69 0 top
LOGO62  OSHW-LOGOS  [OSHW-LOGO-S]  61.21,90.42 0 bottom
LOGO63  SFE_LOGO_NAME_FLAMEBLANK  [BLANK]  87.12,84.58 0 top
LOGO64  QWIIC_LOGO_CONNECTOR  [QWIIC_5.5MM]  87.88,91.69 0 top
LOGO65  OSHW-LOGOS  [OSHW-LOGO-S]  87.12,90.42 0 bottom
LOGO66  SFE_LOGO_NAME_FLAMEBLANK  [BLANK]  113.03,84.58 0 top
LOGO67  QWIIC_LOGO_CONNECTOR  [QWIIC_5.5MM]  113.79,91.69 0 top
LOGO68  OSHW-LOGOS  [OSHW-LOGO-S]  113.03,90.42 0 bottom
LOGO69  SFE_LOGO_NAME_FLAMEBLANK  [BLANK]  138.94,84.58 0 top
LOGO70  QWIIC_LOGO_CONNECTOR  [QWIIC_5.5MM]  139.7,91.69 0 top
LOGO71  OSHW-LOGOS  [OSHW-LOGO-S]  138.94,90.42 0 bottom
LOGO72  SFE_LOGO_NAME_FLAMEBLANK  [BLANK]  164.85,84.58 0 top
PWR  PWR  [SMT-JUMPER_2_NC_TRACE_SILK]  10.05,24.77 180 bottom
PWR1  PWR  [SMT-JUMPER_2_NC_TRACE_SILK]  35.95,24.77 180 bottom
PWR2  PWR  [SMT-JUMPER_2_NC_TRACE_SILK]  61.86,24.77 180 bottom
PWR3  PWR  [SMT-JUMPER_2_NC_TRACE_SILK]  87.77,24.77 180 bottom
PWR4  PWR  [SMT-JUMPER_2_NC_TRACE_SILK]  113.68,24.77 180 bottom
PWR5  PWR  [SMT-JUMPER_2_NC_TRACE_SILK]  139.59,24.77 180 bottom
PWR6  PWR  [SMT-JUMPER_2_NC_TRACE_SILK]  10.05,50.67 180 bottom
PWR7  PWR  [SMT-JUMPER_2_NC_TRACE_SILK]  35.95,50.67 180 bottom
PWR8  PWR  [SMT-JUMPER_2_NC_TRACE_SILK]  61.86,50.67 180 bottom
PWR9  PWR  [SMT-JUMPER_2_NC_TRACE_SILK]  87.77,50.67 180 bottom
PWR10  PWR  [SMT-JUMPER_2_NC_TRACE_SILK]  113.68,50.67 180 bottom
PWR11  PWR  [SMT-JUMPER_2_NC_TRACE_SILK]  139.59,50.67 180 bottom
PWR12  PWR  [SMT-JUMPER_2_NC_TRACE_SILK]  10.05,76.58 180 bottom
PWR13  PWR  [SMT-JUMPER_2_NC_TRACE_SILK]  35.95,76.58 180 bottom
PWR14  PWR  [SMT-JUMPER_2_NC_TRACE_SILK]  61.86,76.58 180 bottom
PWR15  PWR  [SMT-JUMPER_2_NC_TRACE_SILK]  87.77,76.58 180 bottom
PWR16  PWR  [SMT-JUMPER_2_NC_TRACE_SILK]  113.68,76.58 180 bottom
PWR17  PWR  [SMT-JUMPER_2_NC_TRACE_SILK]  139.59,76.58 180 bottom
PWR18  PWR  [SMT-JUMPER_2_NC_TRACE_SILK]  10.05,102.49 180 bottom
PWR19  PWR  [SMT-JUMPER_2_NC_TRACE_SILK]  35.95,102.49 180 bottom
PWR20  PWR  [SMT-JUMPER_2_NC_TRACE_SILK]  61.86,102.49 180 bottom
PWR21  PWR  [SMT-JUMPER_2_NC_TRACE_SILK]  87.77,102.49 180 bottom
PWR22  PWR  [SMT-JUMPER_2_NC_TRACE_SILK]  113.68,102.49 180 bottom
PWR23  PWR  [SMT-JUMPER_2_NC_TRACE_SILK]  139.59,102.49 180 bottom
R1  2.2k  [0603]  29.21,14.99 0 top
R2  2.2k  [0603]  29.21,13.21 0 top
R3  4.7k  [0603]  9.65,25.91 180 top
R4  2.2k  [0603]  55.12,14.99 0 top
R5  2.2k  [0603]  55.12,13.21 0 top
R6  4.7k  [0603]  35.56,25.91 180 top
R7  2.2k  [0603]  81.03,14.99 0 top
R8  2.2k  [0603]  81.03,13.21 0 top
R9  4.7k  [0603]  61.47,25.91 180 top
R10  2.2k  [0603]  106.93,14.99 0 top
R11  2.2k  [0603]  106.93,13.21 0 top
R12  4.7k  [0603]  87.38,25.91 180 top
R13  2.2k  [0603]  132.84,14.99 0 top
R14  2.2k  [0603]  132.84,13.21 0 top
R15  4.7k  [0603]  113.28,25.91 180 top
R16  2.2k  [0603]  158.75,14.99 0 top
R17  2.2k  [0603]  158.75,13.21 0 top
R18  4.7k  [0603]  139.19,25.91 180 top
R19  2.2k  [0603]  29.21,40.89 0 top
R20  2.2k  [0603]  29.21,39.12 0 top
R21  4.7k  [0603]  9.65,51.82 180 top
R22  2.2k  [0603]  55.12,40.89 0 top
R23  2.2k  [0603]  55.12,39.12 0 top
R24  4.7k  [0603]  35.56,51.82 180 top
R25  2.2k  [0603]  81.03,40.89 0 top
R26  2.2k  [0603]  81.03,39.12 0 top
R27  4.7k  [0603]  61.47,51.82 180 top
R28  2.2k  [0603]  106.93,40.89 0 top
R29  2.2k  [0603]  106.93,39.12 0 top
R30  4.7k  [0603]  87.38,51.82 180 top
R31  2.2k  [0603]  132.84,40.89 0 top
R32  2.2k  [0603]  132.84,39.12 0 top
R33  4.7k  [0603]  113.28,51.82 180 top
R34  2.2k  [0603]  158.75,40.89 0 top
R35  2.2k  [0603]  158.75,39.12 0 top
R36  4.7k  [0603]  139.19,51.82 180 top
R37  2.2k  [0603]  29.21,66.8 0 top
R38  2.2k  [0603]  29.21,65.02 0 top
R39  4.7k  [0603]  9.65,77.72 180 top
R40  2.2k  [0603]  55.12,66.8 0 top
R41  2.2k  [0603]  55.12,65.02 0 top
R42  4.7k  [0603]  35.56,77.72 180 top
R43  2.2k  [0603]  81.03,66.8 0 top
R44  2.2k  [0603]  81.03,65.02 0 top
R45  4.7k  [0603]  61.47,77.72 180 top
R46  2.2k  [0603]  106.93,66.8 0 top
R47  2.2k  [0603]  106.93,65.02 0 top
R48  4.7k  [0603]  87.38,77.72 180 top
R49  2.2k  [0603]  132.84,66.8 0 top
R50  2.2k  [0603]  132.84,65.02 0 top
R51  4.7k  [0603]  113.28,77.72 180 top
R52  2.2k  [0603]  158.75,66.8 0 top
R53  2.2k  [0603]  158.75,65.02 0 top
R54  4.7k  [0603]  139.19,77.72 180 top
R55  2.2k  [0603]  29.21,92.71 0 top
R56  2.2k  [0603]  29.21,90.93 0 top
R57  4.7k  [0603]  9.65,103.63 180 top
R58  2.2k  [0603]  55.12,92.71 0 top
R59  2.2k  [0603]  55.12,90.93 0 top
R60  4.7k  [0603]  35.56,103.63 180 top
R61  2.2k  [0603]  81.03,92.71 0 top
R62  2.2k  [0603]  81.03,90.93 0 top
R63  4.7k  [0603]  61.47,103.63 180 top
R64  2.2k  [0603]  106.93,92.71 0 top
R65  2.2k  [0603]  106.93,90.93 0 top
R66  4.7k  [0603]  87.38,103.63 180 top
R67  2.2k  [0603]  132.84,92.71 0 top
R68  2.2k  [0603]  132.84,90.93 0 top
R69  4.7k  [0603]  113.28,103.63 180 top
R70  2.2k  [0603]  158.75,92.71 0 top
R71  2.2k  [0603]  158.75,90.93 0 top
R72  4.7k  [0603]  139.19,103.63 180 top
U1  SCD40/1  [SCD4X]  19.56,19.56 0 top
U2  SCD40/1  [SCD4X]  45.47,19.56 0 top
U3  SCD40  [PRODUCT_IDENT_PASTE_NO-SILK]  52.58,26.67 0 top
U4  SCD41  [PRODUCT_IDENT_NO_NO-SILK]  52.58,24.64 0 top
U5  SCD40/1  [SCD4X]  71.37,19.56 0 top
U6  SCD40  [PRODUCT_IDENT_PASTE_NO-SILK]  26.67,26.67 0 top
U7  SCD41  [PRODUCT_IDENT_NO_NO-SILK]  26.67,24.64 0 top
U8  SCD40  [PRODUCT_IDENT_PASTE_NO-SILK]  78.49,26.67 0 top
U9  SCD41  [PRODUCT_IDENT_NO_NO-SILK]  78.49,24.64 0 top
U10  SCD40/1  [SCD4X]  97.28,19.56 0 top
U11  SCD40  [PRODUCT_IDENT_PASTE_NO-SILK]  104.39,26.67 0 top
U12  SCD41  [PRODUCT_IDENT_NO_NO-SILK]  104.39,24.64 0 top
U13  SCD40/1  [SCD4X]  123.19,19.56 0 top
U14  SCD40  [PRODUCT_IDENT_PASTE_NO-SILK]  130.3,26.67 0 top
U15  SCD41  [PRODUCT_IDENT_NO_NO-SILK]  130.3,24.64 0 top
U16  SCD40/1  [SCD4X]  149.1,19.56 0 top
U17  SCD40  [PRODUCT_IDENT_PASTE_NO-SILK]  156.21,26.67 0 top
U18  SCD41  [PRODUCT_IDENT_NO_NO-SILK]  156.21,24.64 0 top
U19  SCD40/1  [SCD4X]  19.56,45.47 0 top
U20  SCD40  [PRODUCT_IDENT_PASTE_NO-SILK]  26.67,52.58 0 top
U21  SCD41  [PRODUCT_IDENT_NO_NO-SILK]  26.67,50.55 0 top
U22  SCD40/1  [SCD4X]  45.47,45.47 0 top
U23  SCD40  [PRODUCT_IDENT_PASTE_NO-SILK]  52.58,52.58 0 top
U24  SCD41  [PRODUCT_IDENT_NO_NO-SILK]  52.58,50.55 0 top
U25  SCD40/1  [SCD4X]  71.37,45.47 0 top
U26  SCD40  [PRODUCT_IDENT_PASTE_NO-SILK]  78.49,52.58 0 top
U27  SCD41  [PRODUCT_IDENT_NO_NO-SILK]  78.49,50.55 0 top
U28  SCD40/1  [SCD4X]  97.28,45.47 0 top
U29  SCD40  [PRODUCT_IDENT_PASTE_NO-SILK]  104.39,52.58 0 top
U30  SCD41  [PRODUCT_IDENT_NO_NO-SILK]  104.39,50.55 0 top
U31  SCD40/1  [SCD4X]  123.19,45.47 0 top
U32  SCD40  [PRODUCT_IDENT_PASTE_NO-SILK]  130.3,52.58 0 top
U33  SCD41  [PRODUCT_IDENT_NO_NO-SILK]  130.3,50.55 0 top
U34  SCD40/1  [SCD4X]  149.1,45.47 0 top
U35  SCD40  [PRODUCT_IDENT_PASTE_NO-SILK]  156.21,52.58 0 top
U36  SCD41  [PRODUCT_IDENT_NO_NO-SILK]  156.21,50.55 0 top
U37  SCD40/1  [SCD4X]  19.56,71.37 0 top
U38  SCD40  [PRODUCT_IDENT_PASTE_NO-SILK]  26.67,78.49 0 top
U39  SCD41  [PRODUCT_IDENT_NO_NO-SILK]  26.67,76.45 0 top
U40  SCD40/1  [SCD4X]  45.47,71.37 0 top
U41  SCD40  [PRODUCT_IDENT_PASTE_NO-SILK]  52.58,78.49 0 top
U42  SCD41  [PRODUCT_IDENT_NO_NO-SILK]  52.58,76.45 0 top
U43  SCD40/1  [SCD4X]  71.37,71.37 0 top
U44  SCD40  [PRODUCT_IDENT_PASTE_NO-SILK]  78.49,78.49 0 top
U45  SCD41  [PRODUCT_IDENT_NO_NO-SILK]  78.49,76.45 0 top
U46  SCD40/1  [SCD4X]  97.28,71.37 0 top
U47  SCD40  [PRODUCT_IDENT_PASTE_NO-SILK]  104.39,78.49 0 top
U48  SCD41  [PRODUCT_IDENT_NO_NO-SILK]  104.39,76.45 0 top
U49  SCD40/1  [SCD4X]  123.19,71.37 0 top
U50  SCD40  [PRODUCT_IDENT_PASTE_NO-SILK]  130.3,78.49 0 top
U51  SCD41  [PRODUCT_IDENT_NO_NO-SILK]  130.3,76.45 0 top
U52  SCD40/1  [SCD4X]  149.1,71.37 0 top
U53  SCD40  [PRODUCT_IDENT_PASTE_NO-SILK]  156.21,78.49 0 top
U54  SCD41  [PRODUCT_IDENT_NO_NO-SILK]  156.21,76.45 0 top
U55  SCD40/1  [SCD4X]  19.56,97.28 0 top
U56  SCD40  [PRODUCT_IDENT_PASTE_NO-SILK]  26.67,104.39 0 top
U57  SCD41  [PRODUCT_IDENT_NO_NO-SILK]  26.67,102.36 0 top
U58  SCD40/1  [SCD4X]  45.47,97.28 0 top
U59  SCD40  [PRODUCT_IDENT_PASTE_NO-SILK]  52.58,104.39 0 top
U60  SCD41  [PRODUCT_IDENT_NO_NO-SILK]  52.58,102.36 0 top
U61  SCD40/1  [SCD4X]  71.37,97.28 0 top
U62  SCD40  [PRODUCT_IDENT_PASTE_NO-SILK]  78.49,104.39 0 top
U63  SCD41  [PRODUCT_IDENT_NO_NO-SILK]  78.49,102.36 0 top
U64  SCD40/1  [SCD4X]  97.28,97.28 0 top
U65  SCD40  [PRODUCT_IDENT_PASTE_NO-SILK]  104.39,104.39 0 top
U66  SCD41  [PRODUCT_IDENT_NO_NO-SILK]  104.39,102.36 0 top
U67  SCD40/1  [SCD4X]  123.19,97.28 0 top
U68  SCD40  [PRODUCT_IDENT_PASTE_NO-SILK]  130.3,104.39 0 top
U69  SCD41  [PRODUCT_IDENT_NO_NO-SILK]  130.3,102.36 0 top
U70  SCD40/1  [SCD4X]  149.1,97.28 0 top
U71  SCD40  [PRODUCT_IDENT_PASTE_NO-SILK]  156.21,104.39 0 top
U72  SCD41  [PRODUCT_IDENT_NO_NO-SILK]  156.21,102.36 0 top
U$1  [#_GND#14]  15.75,11.18 90 top
U$2  [#_3V3#15]  18.29,11.18 90 top
U$3  [#_SDA#15]  20.83,11.18 90 top
U$4  [#_SCL#16]  23.37,10.92 90 top
U$5  [SFE_LOGO_NAME_.1]  19.56,29.72 0 top
U$6  [SCD414140404021]  27.69,24.64 0 top
U$7  [SCD40414140404022]  27.69,26.67 0 top
U$8  [QWIIC_CO0]  16.76,27.43 0 top
U$9  [SENSOR0]  23.11,27.43 0 top
U$10  [20]  20.07,26.92 0 top
U$11  [SFE_LOGO_FLAME_STOP_.1]  29.72,25.65 0 bottom
U$12  [SFE_LOGO_NAME_.1]  19.81,22.35 0 bottom
U$13  [QWIIC_CO0]  22.61,19.3 0 bottom
U$14  [SENSOR0]  16.26,19.3 0 bottom
U$15  [20]  19.3,18.8 0 bottom
U$16  [#PLED#21]  10.03,21.54 90 bottom
U$17  [#I�C#0]  27.69,14.1 90 bottom
U$18  [#_GND#14]  15.75,11.18 90 bottom
U$19  [#_3V3#15]  18.29,11.18 90 bottom
U$20  [#_SDA#15]  20.83,11.18 90 bottom
U$21  [#_SCL#16]  23.37,10.92 90 bottom
U$22  [#_GND#14]  41.66,11.18 90 top
U$23  [PWR0]  11.94,25.15 90 top
U$24  [#_3V3#15]  44.2,11.18 90 top
U$25  [#_SDA#15]  46.74,11.18 90 top
U$26  [#_SCL#16]  49.28,10.92 90 top
U$27  [SFE_LOGO_NAME_.1]  45.47,29.72 0 top
U$28  [SCD414140404021]  53.59,24.64 0 top
U$29  [SCD40414140404022]  53.59,26.67 0 top
U$30  [QWIIC_CO0]  42.67,27.43 0 top
U$31  [SENSOR0]  49.02,27.43 0 top
U$32  [20]  45.97,26.92 0 top
U$33  [SFE_LOGO_FLAME_STOP_.1]  55.63,25.65 0 bottom
U$34  [SFE_LOGO_NAME_.1]  45.72,22.35 0 bottom
U$35  [QWIIC_CO0]  48.51,19.3 0 bottom
U$36  [SENSOR0]  42.16,19.3 0 bottom
U$37  [20]  45.21,18.8 0 bottom
U$38  [#PLED#21]  35.94,21.54 90 bottom
U$39  [#_GND#14]  41.66,11.18 90 bottom
U$40  [#_3V3#15]  44.2,11.18 90 bottom
U$41  [#_SDA#15]  46.74,11.18 90 bottom
U$42  [#_SCL#16]  49.28,10.92 90 bottom
U$43  [#I�C#0]  53.59,14.1 90 bottom
U$44  [PWR0]  37.85,25.15 90 top
U$45  [#_GND#14]  67.56,11.18 90 top
U$46  [#_3V3#15]  70.1,11.18 90 top
U$47  [#_SDA#15]  72.64,11.18 90 top
U$48  [#_SCL#16]  75.18,10.92 90 top
U$49  [SFE_LOGO_NAME_.1]  71.37,29.72 0 top
U$50  [SCD414140404021]  79.5,24.64 0 top
U$51  [SCD40414140404022]  79.5,26.67 0 top
U$52  [QWIIC_CO0]  68.58,27.43 0 top
U$53  [SENSOR0]  74.93,27.43 0 top
U$54  [20]  71.88,26.92 0 top
U$55  [SFE_LOGO_FLAME_STOP_.1]  81.53,25.65 0 bottom
U$56  [SFE_LOGO_NAME_.1]  71.63,22.35 0 bottom
U$57  [QWIIC_CO0]  74.42,19.3 0 bottom
U$58  [SENSOR0]  68.07,19.3 0 bottom
U$59  [20]  71.12,18.8 0 bottom
U$60  [#PLED#21]  61.85,21.54 90 bottom
U$61  [#_GND#14]  67.56,11.18 90 bottom
U$62  [#_3V3#15]  70.1,11.18 90 bottom
U$63  [#_SDA#15]  72.64,11.18 90 bottom
U$64  [#_SCL#16]  75.18,10.92 90 bottom
U$65  [#I�C#0]  79.5,14.1 90 bottom
U$66  [PWR0]  63.75,25.15 90 top
U$67  [#_GND#14]  93.47,11.18 90 top
U$68  [#_3V3#15]  96.01,11.18 90 top
U$69  [#_SDA#15]  98.55,11.18 90 top
U$70  [#_SCL#16]  101.09,10.92 90 top
U$71  [SFE_LOGO_NAME_.1]  97.28,29.72 0 top
U$72  [SCD414140404021]  105.41,24.64 0 top
U$73  [SCD40414140404022]  105.41,26.67 0 top
U$74  [QWIIC_CO0]  94.49,27.43 0 top
U$75  [SENSOR0]  100.84,27.43 0 top
U$76  [20]  97.79,26.92 0 top
U$77  [SFE_LOGO_FLAME_STOP_.1]  107.44,25.65 0 bottom
U$78  [SFE_LOGO_NAME_.1]  97.54,22.35 0 bottom
U$79  [QWIIC_CO0]  100.33,19.3 0 bottom
U$80  [SENSOR0]  93.98,19.3 0 bottom
U$81  [20]  97.03,18.8 0 bottom
U$82  [#PLED#21]  87.76,21.54 90 bottom
U$83  [#_GND#14]  93.47,11.18 90 bottom
U$84  [#_3V3#15]  96.01,11.18 90 bottom
U$85  [#_SDA#15]  98.55,11.18 90 bottom
U$86  [#_SCL#16]  101.09,10.92 90 bottom
U$87  [#I�C#0]  105.41,14.1 90 bottom
U$88  [PWR0]  89.66,25.15 90 top
U$89  [#_GND#14]  119.38,11.18 90 top
U$90  [#_3V3#15]  121.92,11.18 90 top
U$91  [#_SDA#15]  124.46,11.18 90 top
U$92  [#_SCL#16]  127,10.92 90 top
U$93  [SFE_LOGO_NAME_.1]  123.19,29.72 0 top
U$94  [SCD414140404021]  131.32,24.64 0 top
U$95  [SCD40414140404022]  131.32,26.67 0 top
U$96  [QWIIC_CO0]  120.4,27.43 0 top
U$97  [SENSOR0]  126.75,27.43 0 top
U$98  [20]  123.7,26.92 0 top
U$99  [SFE_LOGO_FLAME_STOP_.1]  133.35,25.65 0 bottom
U$100  [SFE_LOGO_NAME_.1]  123.44,22.35 0 bottom
U$101  [QWIIC_CO0]  126.24,19.3 0 bottom
U$102  [SENSOR0]  119.89,19.3 0 bottom
U$103  [20]  122.94,18.8 0 bottom
U$104  [#PLED#21]  113.67,21.54 90 bottom
U$105  [#_GND#14]  119.38,11.18 90 bottom
U$106  [#_3V3#15]  121.92,11.18 90 bottom
U$107  [#_SDA#15]  124.46,11.18 90 bottom
U$108  [#_SCL#16]  127,10.92 90 bottom
U$109  [#I�C#0]  131.32,14.1 90 bottom
U$110  [PWR0]  115.57,25.15 90 top
U$111  [#_GND#14]  145.29,11.18 90 top
U$112  [#_3V3#15]  147.83,11.18 90 top
U$113  [#_SDA#15]  150.37,11.18 90 top
U$114  [#_SCL#16]  152.91,10.92 90 top
U$115  [SFE_LOGO_NAME_.1]  149.1,29.72 0 top
U$116  [SCD414140404021]  157.23,24.64 0 top
U$117  [SCD40414140404022]  157.23,26.67 0 top
U$118  [QWIIC_CO0]  146.3,27.43 0 top
U$119  [SENSOR0]  152.65,27.43 0 top
U$120  [20]  149.61,26.92 0 top
U$121  [SFE_LOGO_FLAME_STOP_.1]  159.26,25.65 0 bottom
U$122  [SFE_LOGO_NAME_.1]  149.35,22.35 0 bottom
U$123  [QWIIC_CO0]  152.15,19.3 0 bottom
U$124  [SENSOR0]  145.8,19.3 0 bottom
U$125  [20]  148.84,18.8 0 bottom
U$126  [#PLED#21]  139.57,21.54 90 bottom
U$127  [#_GND#14]  145.29,11.18 90 bottom
U$128  [#_3V3#15]  147.83,11.18 90 bottom
U$129  [#_SDA#15]  150.37,11.18 90 bottom
U$130  [#_SCL#16]  152.91,10.92 90 bottom
U$131  [#I�C#0]  157.23,14.1 90 bottom
U$132  [PWR0]  141.48,25.15 90 top
U$133  [#_GND#14]  15.75,37.08 90 top
U$134  [#_3V3#15]  18.29,37.08 90 top
U$135  [#_SDA#15]  20.83,37.08 90 top
U$136  [#_SCL#16]  23.37,36.83 90 top
U$137  [SFE_LOGO_NAME_.1]  19.56,55.63 0 top
U$138  [SCD414140404021]  27.69,50.55 0 top
U$139  [SCD40414140404022]  27.69,52.58 0 top
U$140  [QWIIC_CO0]  16.76,53.34 0 top
U$141  [SENSOR0]  23.11,53.34 0 top
U$142  [20]  20.07,52.83 0 top
U$143  [SFE_LOGO_FLAME_STOP_.1]  29.72,51.56 0 bottom
U$144  [SFE_LOGO_NAME_.1]  19.81,48.26 0 bottom
U$145  [QWIIC_CO0]  22.61,45.21 0 bottom
U$146  [SENSOR0]  16.26,45.21 0 bottom
U$147  [20]  19.3,44.7 0 bottom
U$148  [#PLED#21]  10.03,47.45 90 bottom
U$149  [#_GND#14]  15.75,37.08 90 bottom
U$150  [#_3V3#15]  18.29,37.08 90 bottom
U$151  [#_SDA#15]  20.83,37.08 90 bottom
U$152  [#_SCL#16]  23.37,36.83 90 bottom
U$153  [#I�C#0]  27.69,40 90 bottom
U$154  [PWR0]  11.94,51.05 90 top
U$155  [#_GND#14]  41.66,37.08 90 top
U$156  [#_3V3#15]  44.2,37.08 90 top
U$157  [#_SDA#15]  46.74,37.08 90 top
U$158  [#_SCL#16]  49.28,36.83 90 top
U$159  [SFE_LOGO_NAME_.1]  45.47,55.63 0 top
U$160  [SCD414140404021]  53.59,50.55 0 top
U$161  [SCD40414140404022]  53.59,52.58 0 top
U$162  [QWIIC_CO0]  42.67,53.34 0 top
U$163  [SENSOR0]  49.02,53.34 0 top
U$164  [20]  45.97,52.83 0 top
U$165  [SFE_LOGO_FLAME_STOP_.1]  55.63,51.56 0 bottom
U$166  [SFE_LOGO_NAME_.1]  45.72,48.26 0 bottom
U$167  [QWIIC_CO0]  48.51,45.21 0 bottom
U$168  [SENSOR0]  42.16,45.21 0 bottom
U$169  [20]  45.21,44.7 0 bottom
U$170  [#PLED#21]  35.94,47.45 90 bottom
U$171  [#_GND#14]  41.66,37.08 90 bottom
U$172  [#_3V3#15]  44.2,37.08 90 bottom
U$173  [#_SDA#15]  46.74,37.08 90 bottom
U$174  [#_SCL#16]  49.28,36.83 90 bottom
U$175  [#I�C#0]  53.59,40 90 bottom
U$176  [PWR0]  37.85,51.05 90 top
U$177  [#_GND#14]  67.56,37.08 90 top
U$178  [#_3V3#15]  70.1,37.08 90 top
U$179  [#_SDA#15]  72.64,37.08 90 top
U$180  [#_SCL#16]  75.18,36.83 90 top
U$181  [SFE_LOGO_NAME_.1]  71.37,55.63 0 top
U$182  [SCD414140404021]  79.5,50.55 0 top
U$183  [SCD40414140404022]  79.5,52.58 0 top
U$184  [QWIIC_CO0]  68.58,53.34 0 top
U$185  [SENSOR0]  74.93,53.34 0 top
U$186  [20]  71.88,52.83 0 top
U$187  [SFE_LOGO_FLAME_STOP_.1]  81.53,51.56 0 bottom
U$188  [SFE_LOGO_NAME_.1]  71.63,48.26 0 bottom
U$189  [QWIIC_CO0]  74.42,45.21 0 bottom
U$190  [SENSOR0]  68.07,45.21 0 bottom
U$191  [20]  71.12,44.7 0 bottom
U$192  [#PLED#21]  61.85,47.45 90 bottom
U$193  [#_GND#14]  67.56,37.08 90 bottom
U$194  [#_3V3#15]  70.1,37.08 90 bottom
U$195  [#_SDA#15]  72.64,37.08 90 bottom
U$196  [#_SCL#16]  75.18,36.83 90 bottom
U$197  [#I�C#0]  79.5,40 90 bottom
U$198  [PWR0]  63.75,51.05 90 top
U$199  [#_GND#14]  93.47,37.08 90 top
U$200  [#_3V3#15]  96.01,37.08 90 top
U$201  [#_SDA#15]  98.55,37.08 90 top
U$202  [#_SCL#16]  101.09,36.83 90 top
U$203  [SFE_LOGO_NAME_.1]  97.28,55.63 0 top
U$204  [SCD414140404021]  105.41,50.55 0 top
U$205  [SCD40414140404022]  105.41,52.58 0 top
U$206  [QWIIC_CO0]  94.49,53.34 0 top
U$207  [SENSOR0]  100.84,53.34 0 top
U$208  [20]  97.79,52.83 0 top
U$209  [SFE_LOGO_FLAME_STOP_.1]  107.44,51.56 0 bottom
U$210  [SFE_LOGO_NAME_.1]  97.54,48.26 0 bottom
U$211  [QWIIC_CO0]  100.33,45.21 0 bottom
U$212  [SENSOR0]  93.98,45.21 0 bottom
U$213  [20]  97.03,44.7 0 bottom
U$214  [#PLED#21]  87.76,47.45 90 bottom
U$215  [#_GND#14]  93.47,37.08 90 bottom
U$216  [#_3V3#15]  96.01,37.08 90 bottom
U$217  [#_SDA#15]  98.55,37.08 90 bottom
U$218  [#_SCL#16]  101.09,36.83 90 bottom
U$219  [#I�C#0]  105.41,40 90 bottom
U$220  [PWR0]  89.66,51.05 90 top
U$221  [#_GND#14]  119.38,37.08 90 top
U$222  [#_3V3#15]  121.92,37.08 90 top
U$223  [#_SDA#15]  124.46,37.08 90 top
U$224  [#_SCL#16]  127,36.83 90 top
U$225  [SFE_LOGO_NAME_.1]  123.19,55.63 0 top
U$226  [SCD414140404021]  131.32,50.55 0 top
U$227  [SCD40414140404022]  131.32,52.58 0 top
U$228  [QWIIC_CO0]  120.4,53.34 0 top
U$229  [SENSOR0]  126.75,53.34 0 top
U$230  [20]  123.7,52.83 0 top
U$231  [SFE_LOGO_FLAME_STOP_.1]  133.35,51.56 0 bottom
U$232  [SFE_LOGO_NAME_.1]  123.44,48.26 0 bottom
U$233  [QWIIC_CO0]  126.24,45.21 0 bottom
U$234  [SENSOR0]  119.89,45.21 0 bottom
U$235  [20]  122.94,44.7 0 bottom
U$236  [#PLED#21]  113.67,47.45 90 bottom
U$237  [#_GND#14]  119.38,37.08 90 bottom
U$238  [#_3V3#15]  121.92,37.08 90 bottom
U$239  [#_SDA#15]  124.46,37.08 90 bottom
U$240  [#_SCL#16]  127,36.83 90 bottom
U$241  [#I�C#0]  131.32,40 90 bottom
U$242  [PWR0]  115.57,51.05 90 top
U$243  [#_GND#14]  145.29,37.08 90 top
U$244  [#_3V3#15]  147.83,37.08 90 top
U$245  [#_SDA#15]  150.37,37.08 90 top
U$246  [#_SCL#16]  152.91,36.83 90 top
U$247  [SFE_LOGO_NAME_.1]  149.1,55.63 0 top
U$248  [SCD414140404021]  157.23,50.55 0 top
U$249  [SCD40414140404022]  157.23,52.58 0 top
U$250  [QWIIC_CO0]  146.3,53.34 0 top
U$251  [SENSOR0]  152.65,53.34 0 top
U$252  [20]  149.61,52.83 0 top
U$253  [SFE_LOGO_FLAME_STOP_.1]  159.26,51.56 0 bottom
U$254  [SFE_LOGO_NAME_.1]  149.35,48.26 0 bottom
U$255  [QWIIC_CO0]  152.15,45.21 0 bottom
U$256  [SENSOR0]  145.8,45.21 0 bottom
U$257  [20]  148.84,44.7 0 bottom
U$258  [#PLED#21]  139.57,47.45 90 bottom
U$259  [#_GND#14]  145.29,37.08 90 bottom
U$260  [#_3V3#15]  147.83,37.08 90 bottom
U$261  [#_SDA#15]  150.37,37.08 90 bottom
U$262  [#_SCL#16]  152.91,36.83 90 bottom
U$263  [#I�C#0]  157.23,40 90 bottom
U$264  [PWR0]  141.48,51.05 90 top
U$265  [#_GND#14]  15.75,62.99 90 top
U$266  [#_3V3#15]  18.29,62.99 90 top
U$267  [#_SDA#15]  20.83,62.99 90 top
U$268  [#_SCL#16]  23.37,62.74 90 top
U$269  [SFE_LOGO_NAME_.1]  19.56,81.53 0 top
U$270  [SCD414140404021]  27.69,76.45 0 top
U$271  [SCD40414140404022]  27.69,78.49 0 top
U$272  [QWIIC_CO0]  16.76,79.25 0 top
U$273  [SENSOR0]  23.11,79.25 0 top
U$274  [20]  20.07,78.74 0 top
U$275  [SFE_LOGO_FLAME_STOP_.1]  29.72,77.47 0 bottom
U$276  [SFE_LOGO_NAME_.1]  19.81,74.17 0 bottom
U$277  [QWIIC_CO0]  22.61,71.12 0 bottom
U$278  [SENSOR0]  16.26,71.12 0 bottom
U$279  [20]  19.3,70.61 0 bottom
U$280  [#PLED#21]  10.03,73.36 90 bottom
U$281  [#_GND#14]  15.75,62.99 90 bottom
U$282  [#_3V3#15]  18.29,62.99 90 bottom
U$283  [#_SDA#15]  20.83,62.99 90 bottom
U$284  [#_SCL#16]  23.37,62.74 90 bottom
U$285  [#I�C#0]  27.69,65.91 90 bottom
U$286  [PWR0]  11.94,76.96 90 top
U$287  [#_GND#14]  41.66,62.99 90 top
U$288  [#_3V3#15]  44.2,62.99 90 top
U$289  [#_SDA#15]  46.74,62.99 90 top
U$290  [#_SCL#16]  49.28,62.74 90 top
U$291  [SFE_LOGO_NAME_.1]  45.47,81.53 0 top
U$292  [SCD414140404021]  53.59,76.45 0 top
U$293  [SCD40414140404022]  53.59,78.49 0 top
U$294  [QWIIC_CO0]  42.67,79.25 0 top
U$295  [SENSOR0]  49.02,79.25 0 top
U$296  [20]  45.97,78.74 0 top
U$297  [SFE_LOGO_FLAME_STOP_.1]  55.63,77.47 0 bottom
U$298  [SFE_LOGO_NAME_.1]  45.72,74.17 0 bottom
U$299  [QWIIC_CO0]  48.51,71.12 0 bottom
U$300  [SENSOR0]  42.16,71.12 0 bottom
U$301  [20]  45.21,70.61 0 bottom
U$302  [#PLED#21]  35.94,73.36 90 bottom
U$303  [#_GND#14]  41.66,62.99 90 bottom
U$304  [#_3V3#15]  44.2,62.99 90 bottom
U$305  [#_SDA#15]  46.74,62.99 90 bottom
U$306  [#_SCL#16]  49.28,62.74 90 bottom
U$307  [#I�C#0]  53.59,65.91 90 bottom
U$308  [PWR0]  37.85,76.96 90 top
U$309  [#_GND#14]  67.56,62.99 90 top
U$310  [#_3V3#15]  70.1,62.99 90 top
U$311  [#_SDA#15]  72.64,62.99 90 top
U$312  [#_SCL#16]  75.18,62.74 90 top
U$313  [SFE_LOGO_NAME_.1]  71.37,81.53 0 top
U$314  [SCD414140404021]  79.5,76.45 0 top
U$315  [SCD40414140404022]  79.5,78.49 0 top
U$316  [QWIIC_CO0]  68.58,79.25 0 top
U$317  [SENSOR0]  74.93,79.25 0 top
U$318  [20]  71.88,78.74 0 top
U$319  [SFE_LOGO_FLAME_STOP_.1]  81.53,77.47 0 bottom
U$320  [SFE_LOGO_NAME_.1]  71.63,74.17 0 bottom
U$321  [QWIIC_CO0]  74.42,71.12 0 bottom
U$322  [SENSOR0]  68.07,71.12 0 bottom
U$323  [20]  71.12,70.61 0 bottom
U$324  [#PLED#21]  61.85,73.36 90 bottom
U$325  [#_GND#14]  67.56,62.99 90 bottom
U$326  [#_3V3#15]  70.1,62.99 90 bottom
U$327  [#_SDA#15]  72.64,62.99 90 bottom
U$328  [#_SCL#16]  75.18,62.74 90 bottom
U$329  [#I�C#0]  79.5,65.91 90 bottom
U$330  [PWR0]  63.75,76.96 90 top
U$331  [#_GND#14]  93.47,62.99 90 top
U$332  [#_3V3#15]  96.01,62.99 90 top
U$333  [#_SDA#15]  98.55,62.99 90 top
U$334  [#_SCL#16]  101.09,62.74 90 top
U$335  [SFE_LOGO_NAME_.1]  97.28,81.53 0 top
U$336  [SCD414140404021]  105.41,76.45 0 top
U$337  [SCD40414140404022]  105.41,78.49 0 top
U$338  [QWIIC_CO0]  94.49,79.25 0 top
U$339  [SENSOR0]  100.84,79.25 0 top
U$340  [20]  97.79,78.74 0 top
U$341  [SFE_LOGO_FLAME_STOP_.1]  107.44,77.47 0 bottom
U$342  [SFE_LOGO_NAME_.1]  97.54,74.17 0 bottom
U$343  [QWIIC_CO0]  100.33,71.12 0 bottom
U$344  [SENSOR0]  93.98,71.12 0 bottom
U$345  [20]  97.03,70.61 0 bottom
U$346  [#PLED#21]  87.76,73.36 90 bottom
U$347  [#_GND#14]  93.47,62.99 90 bottom
U$348  [#_3V3#15]  96.01,62.99 90 bottom
U$349  [#_SDA#15]  98.55,62.99 90 bottom
U$350  [#_SCL#16]  101.09,62.74 90 bottom
U$351  [#I�C#0]  105.41,65.91 90 bottom
U$352  [PWR0]  89.66,76.96 90 top
U$353  [#_GND#14]  119.38,62.99 90 top
U$354  [#_3V3#15]  121.92,62.99 90 top
U$355  [#_SDA#15]  124.46,62.99 90 top
U$356  [#_SCL#16]  127,62.74 90 top
U$357  [SFE_LOGO_NAME_.1]  123.19,81.53 0 top
U$358  [SCD414140404021]  131.32,76.45 0 top
U$359  [SCD40414140404022]  131.32,78.49 0 top
U$360  [QWIIC_CO0]  120.4,79.25 0 top
U$361  [SENSOR0]  126.75,79.25 0 top
U$362  [20]  123.7,78.74 0 top
U$363  [SFE_LOGO_FLAME_STOP_.1]  133.35,77.47 0 bottom
U$364  [SFE_LOGO_NAME_.1]  123.44,74.17 0 bottom
U$365  [QWIIC_CO0]  126.24,71.12 0 bottom
U$366  [SENSOR0]  119.89,71.12 0 bottom
U$367  [20]  122.94,70.61 0 bottom
U$368  [#PLED#21]  113.67,73.36 90 bottom
U$369  [#_GND#14]  119.38,62.99 90 bottom
U$370  [#_3V3#15]  121.92,62.99 90 bottom
U$371  [#_SDA#15]  124.46,62.99 90 bottom
U$372  [#_SCL#16]  127,62.74 90 bottom
U$373  [#I�C#0]  131.32,65.91 90 bottom
U$374  [PWR0]  115.57,76.96 90 top
U$375  [#_GND#14]  145.29,62.99 90 top
U$376  [#_3V3#15]  147.83,62.99 90 top
U$377  [#_SDA#15]  150.37,62.99 90 top
U$378  [#_SCL#16]  152.91,62.74 90 top
U$379  [SFE_LOGO_NAME_.1]  149.1,81.53 0 top
U$380  [SCD414140404021]  157.23,76.45 0 top
U$381  [SCD40414140404022]  157.23,78.49 0 top
U$382  [QWIIC_CO0]  146.3,79.25 0 top
U$383  [SENSOR0]  152.65,79.25 0 top
U$384  [20]  149.61,78.74 0 top
U$385  [SFE_LOGO_FLAME_STOP_.1]  159.26,77.47 0 bottom
U$386  [SFE_LOGO_NAME_.1]  149.35,74.17 0 bottom
U$387  [QWIIC_CO0]  152.15,71.12 0 bottom
U$388  [SENSOR0]  145.8,71.12 0 bottom
U$389  [20]  148.84,70.61 0 bottom
U$390  [#PLED#21]  139.57,73.36 90 bottom
U$391  [#_GND#14]  145.29,62.99 90 bottom
U$392  [#_3V3#15]  147.83,62.99 90 bottom
U$393  [#_SDA#15]  150.37,62.99 90 bottom
U$394  [#_SCL#16]  152.91,62.74 90 bottom
U$395  [#I�C#0]  157.23,65.91 90 bottom
U$396  [PWR0]  141.48,76.96 90 top
U$397  [#_GND#14]  15.75,88.9 90 top
U$398  [#_3V3#15]  18.29,88.9 90 top
U$399  [#_SDA#15]  20.83,88.9 90 top
U$400  [#_SCL#16]  23.37,88.65 90 top
U$401  [SFE_LOGO_NAME_.1]  19.56,107.44 0 top
U$402  [SCD414140404021]  27.69,102.36 0 top
U$403  [SCD40414140404022]  27.69,104.39 0 top
U$404  [QWIIC_CO0]  16.76,105.16 0 top
U$405  [SENSOR0]  23.11,105.16 0 top
U$406  [20]  20.07,104.65 0 top
U$407  [SFE_LOGO_FLAME_STOP_.1]  29.72,103.38 0 bottom
U$408  [SFE_LOGO_NAME_.1]  19.81,100.08 0 bottom
U$409  [QWIIC_CO0]  22.61,97.03 0 bottom
U$410  [SENSOR0]  16.26,97.03 0 bottom
U$411  [20]  19.3,96.52 0 bottom
U$412  [#PLED#21]  10.03,99.26 90 bottom
U$413  [#_GND#14]  15.75,88.9 90 bottom
U$414  [#_3V3#15]  18.29,88.9 90 bottom
U$415  [#_SDA#15]  20.83,88.9 90 bottom
U$416  [#_SCL#16]  23.37,88.65 90 bottom
U$417  [#I�C#0]  27.69,91.82 90 bottom
U$418  [PWR0]  11.94,102.87 90 top